# Altium PCB PX4FLOW2.1_X0.PcbDoc (part 1 of 2)
Units mm, origin at the board's own origin, x right, y up, seen from the top; angles counter-clockwise.
Board outline 26.52 x 51.99 mm, 6 copper layers (Top, Signal Layer 1, Signal Layer 2, Route2, Route15, Bottom), stack 1.474 mm thick; 94 components, 98 nets, 424 pads, 377 vias.
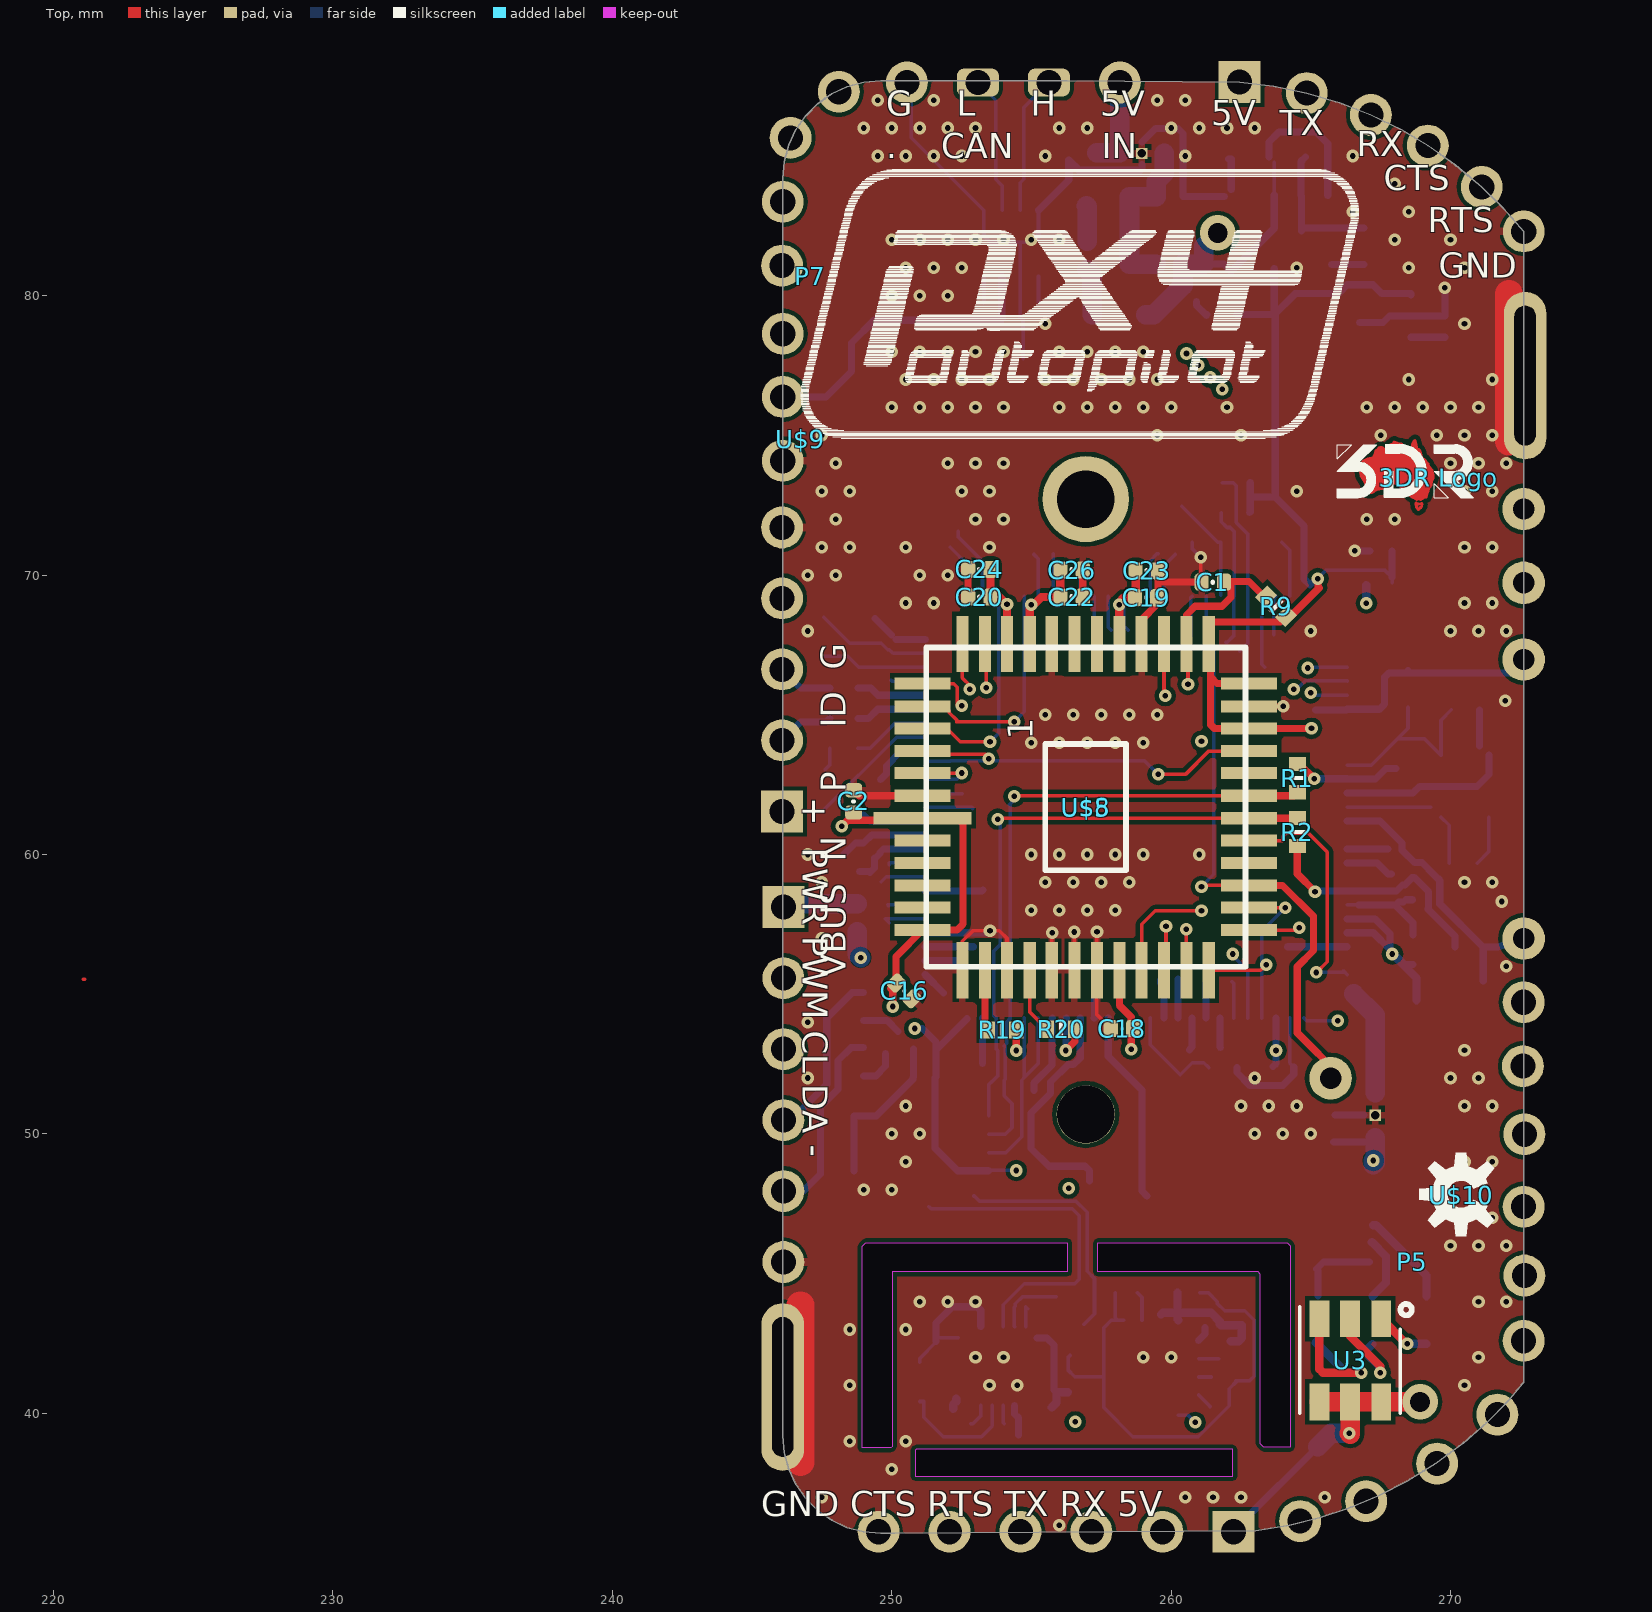
[diagram p0: Top view]
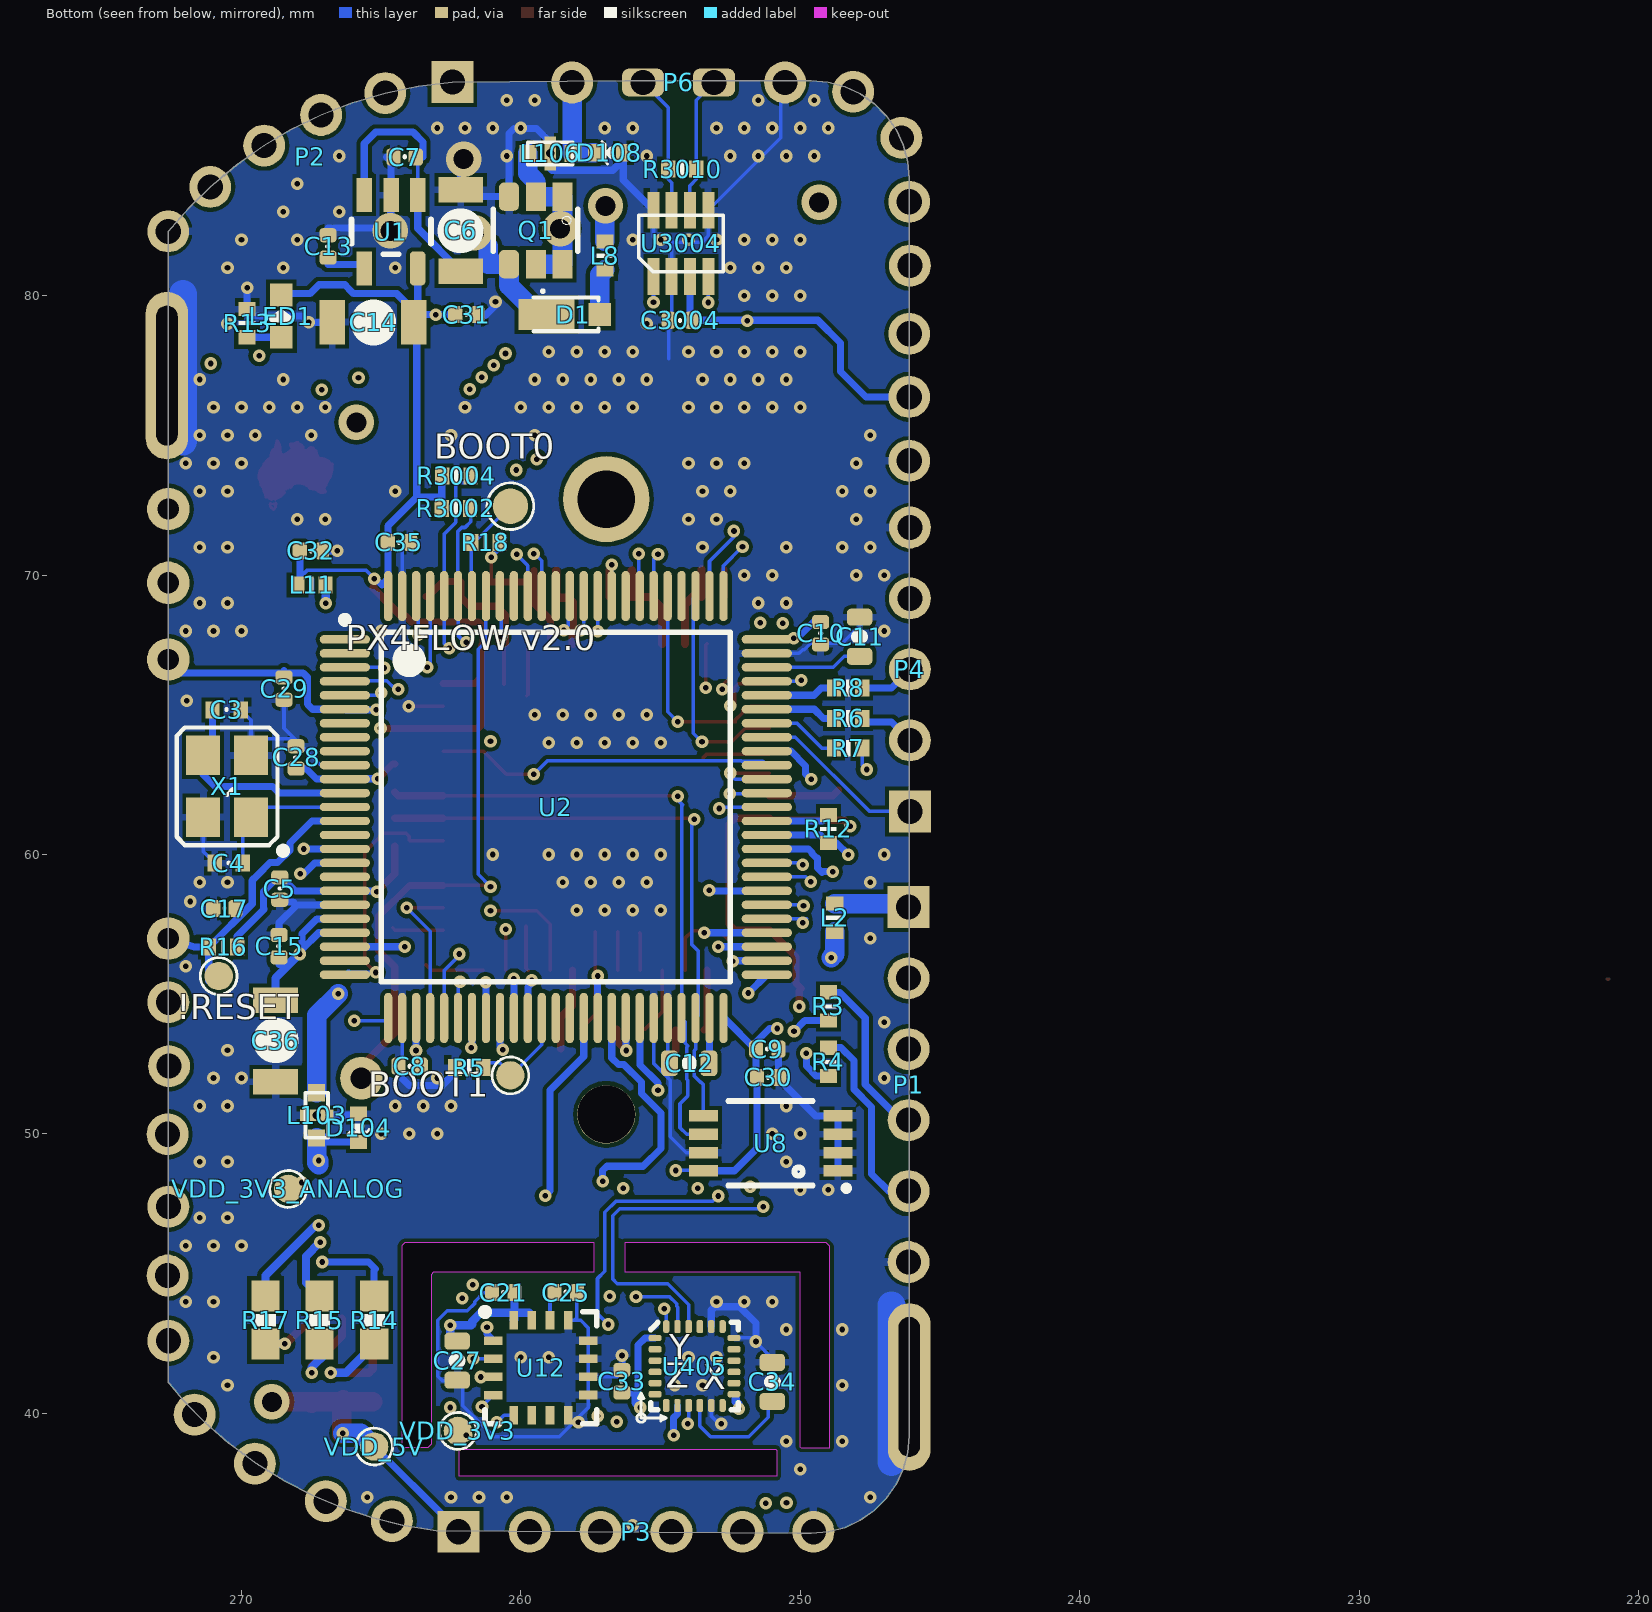
[diagram p1: Bottom view, seen from below]
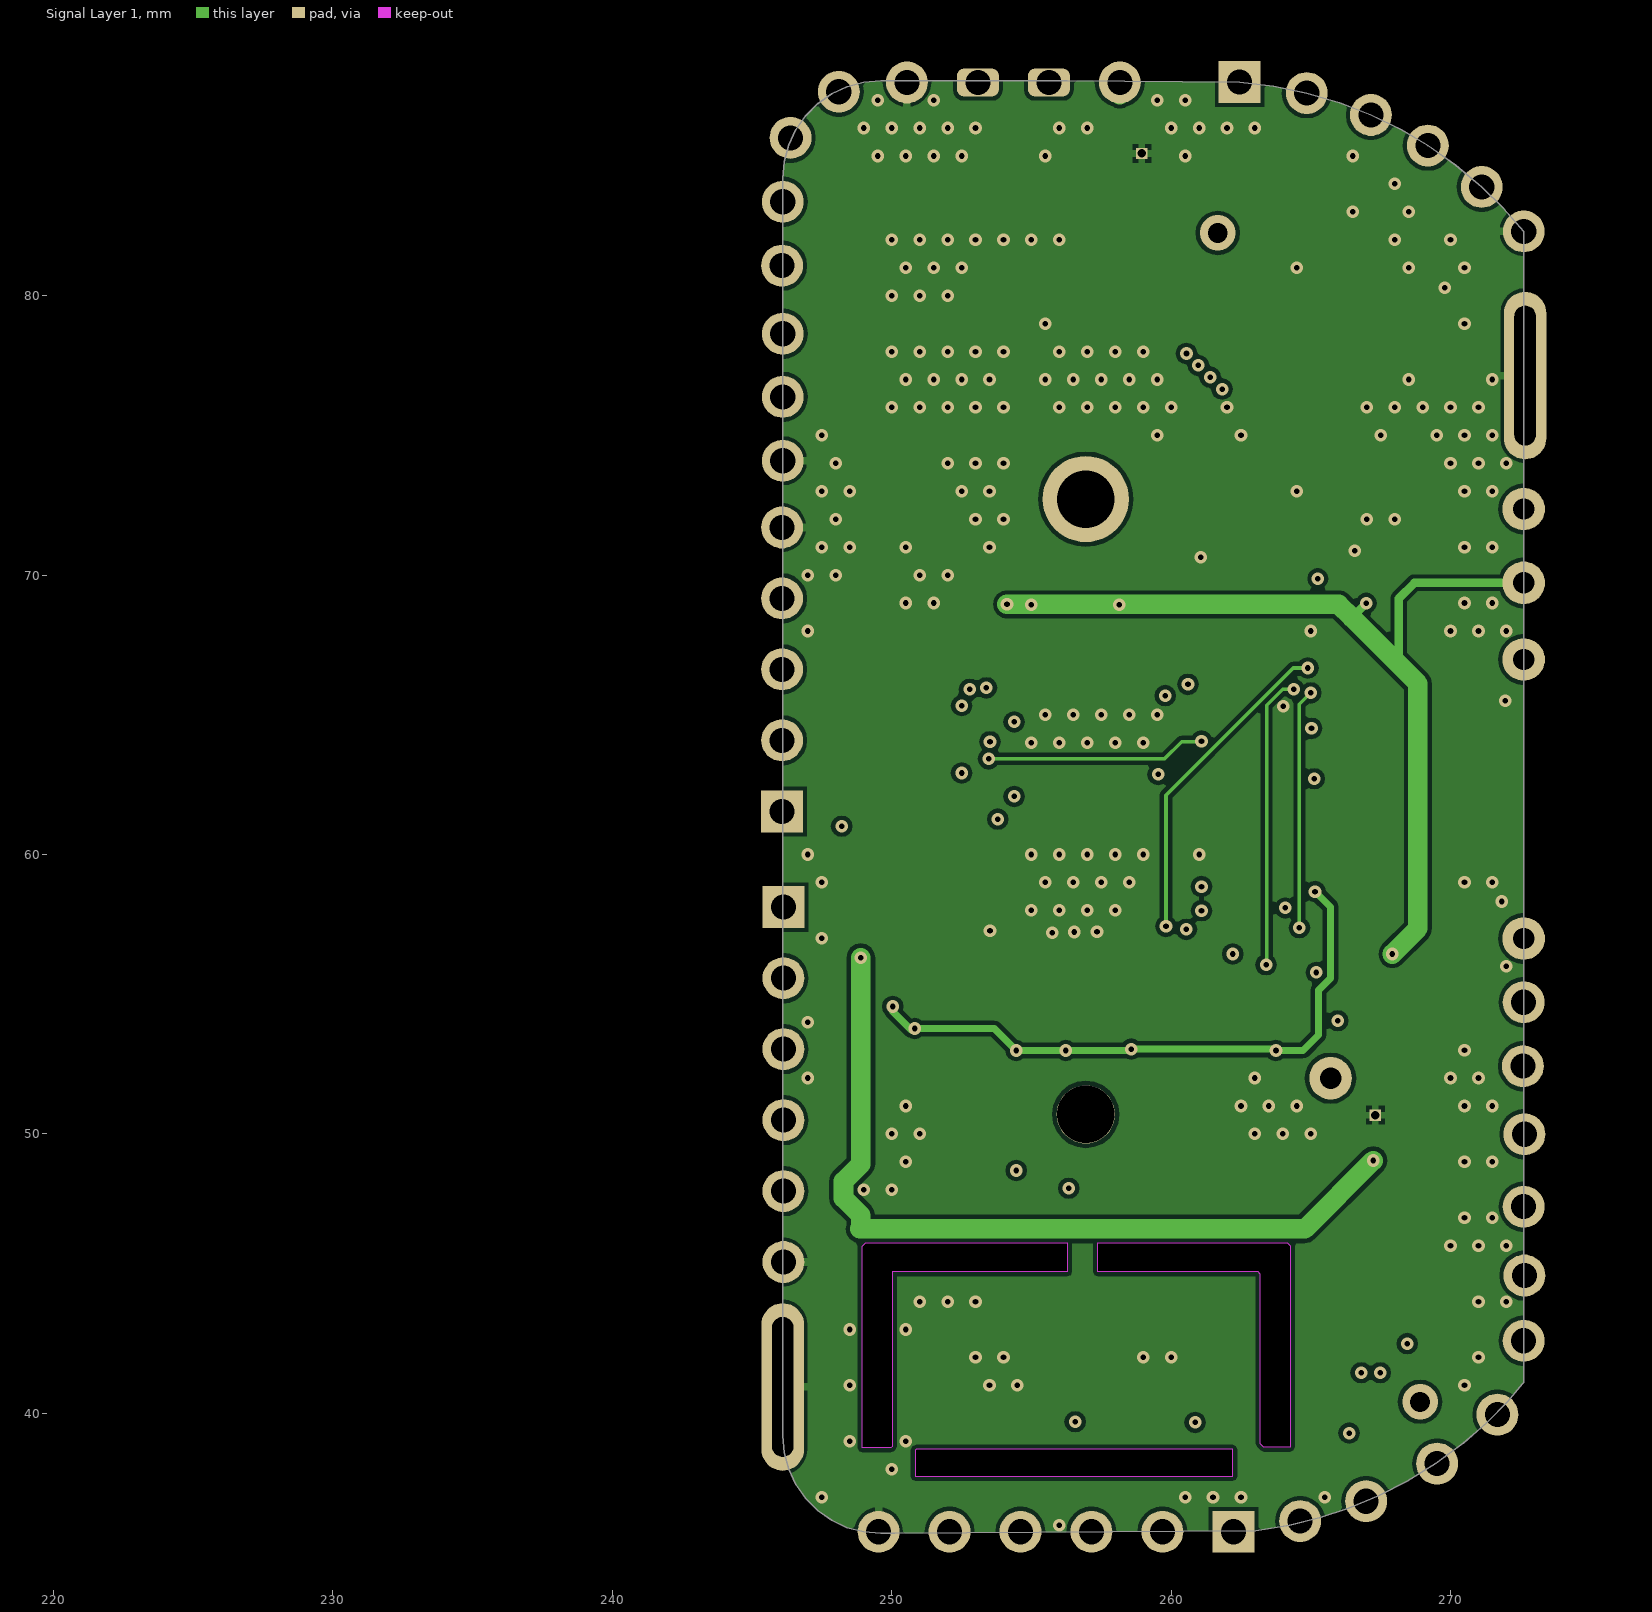
[diagram p2: Signal Layer 1]
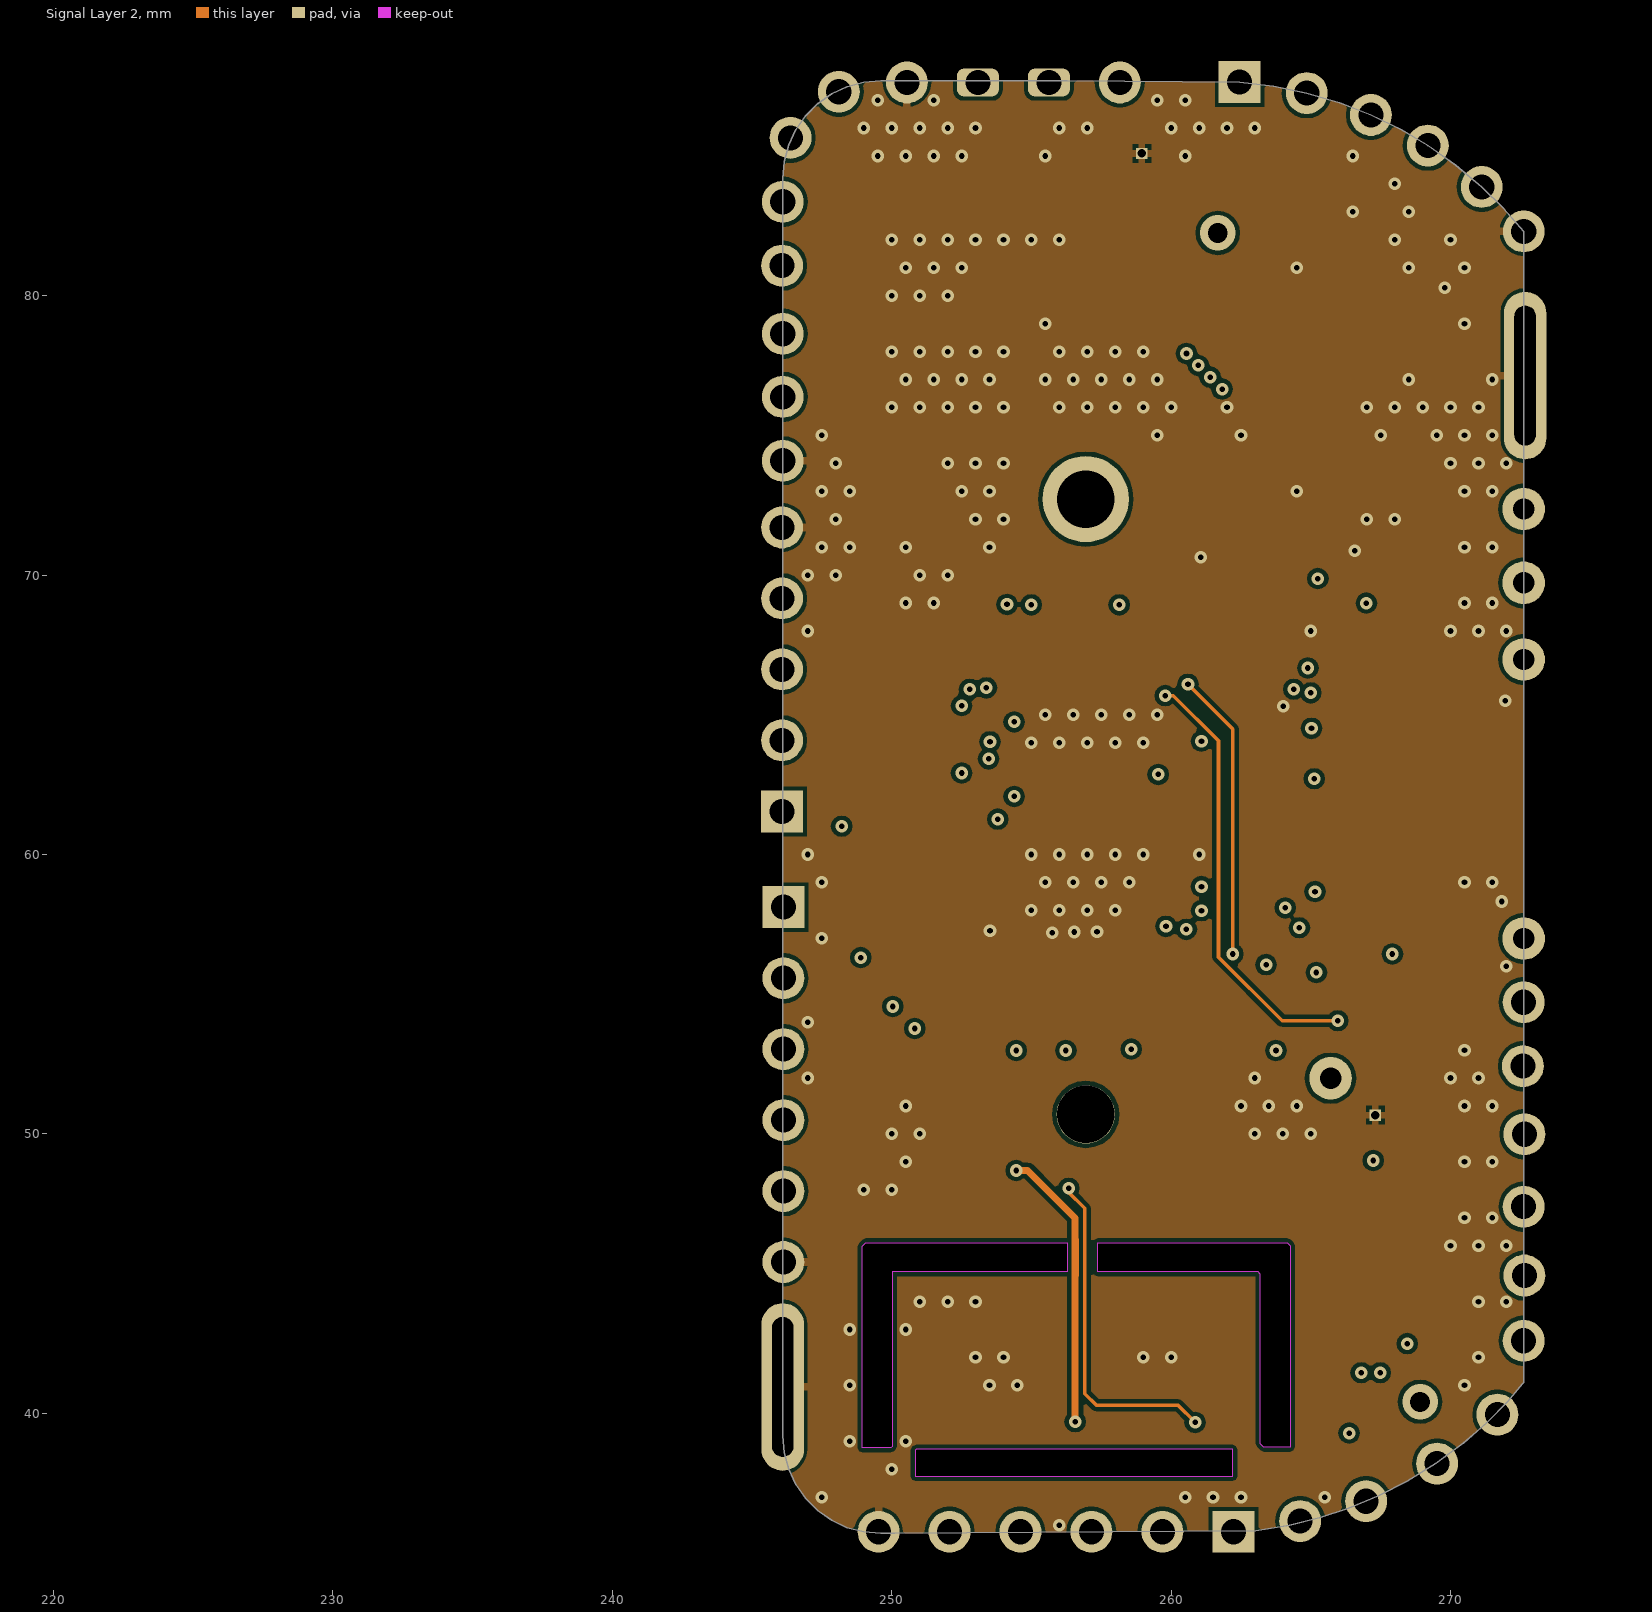
[diagram p3: Signal Layer 2]
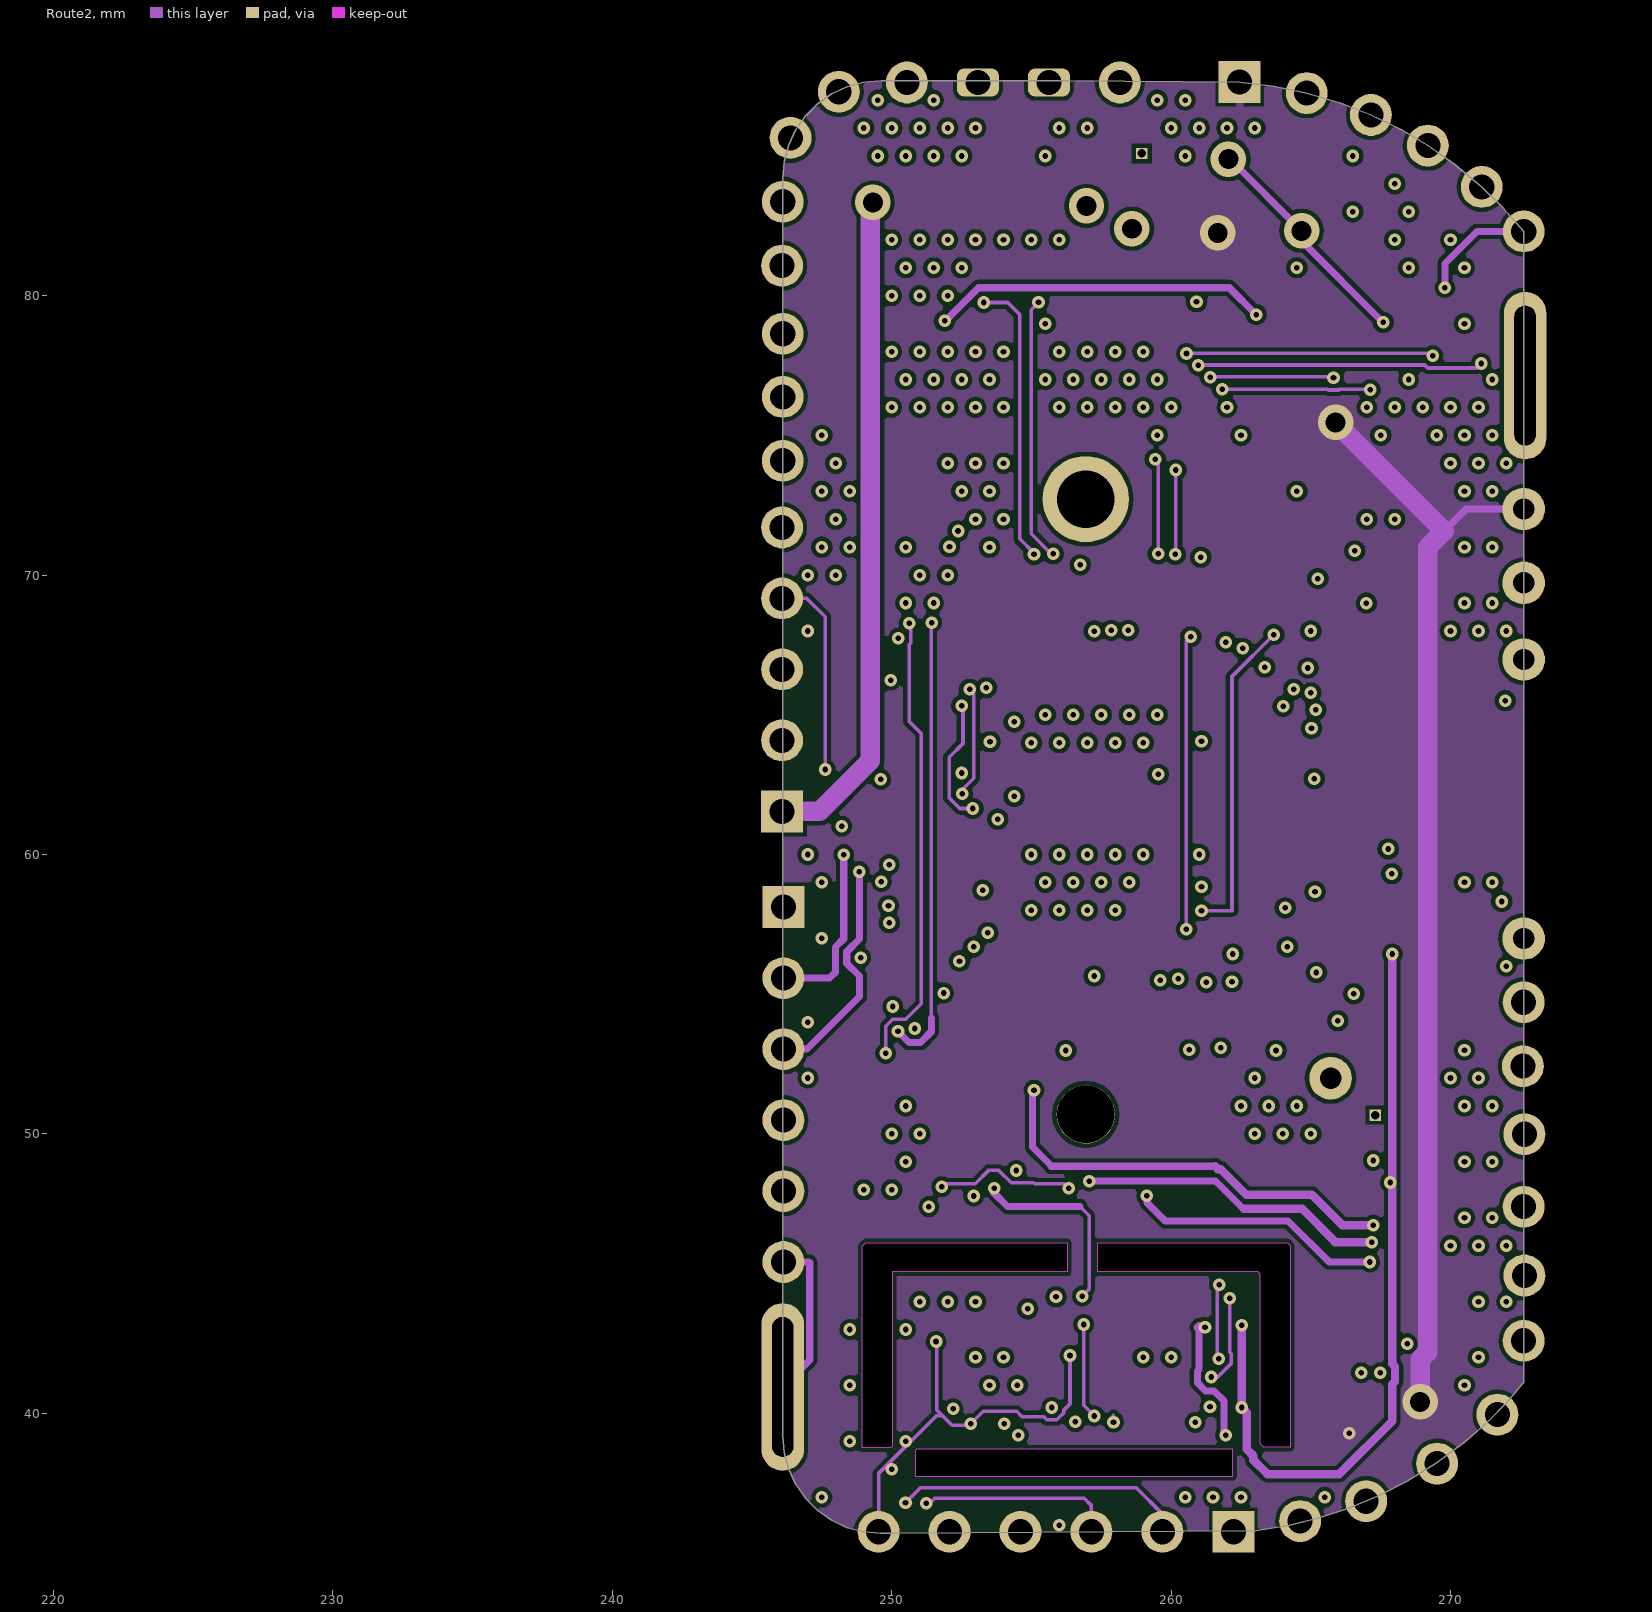
[diagram p4: Route2]
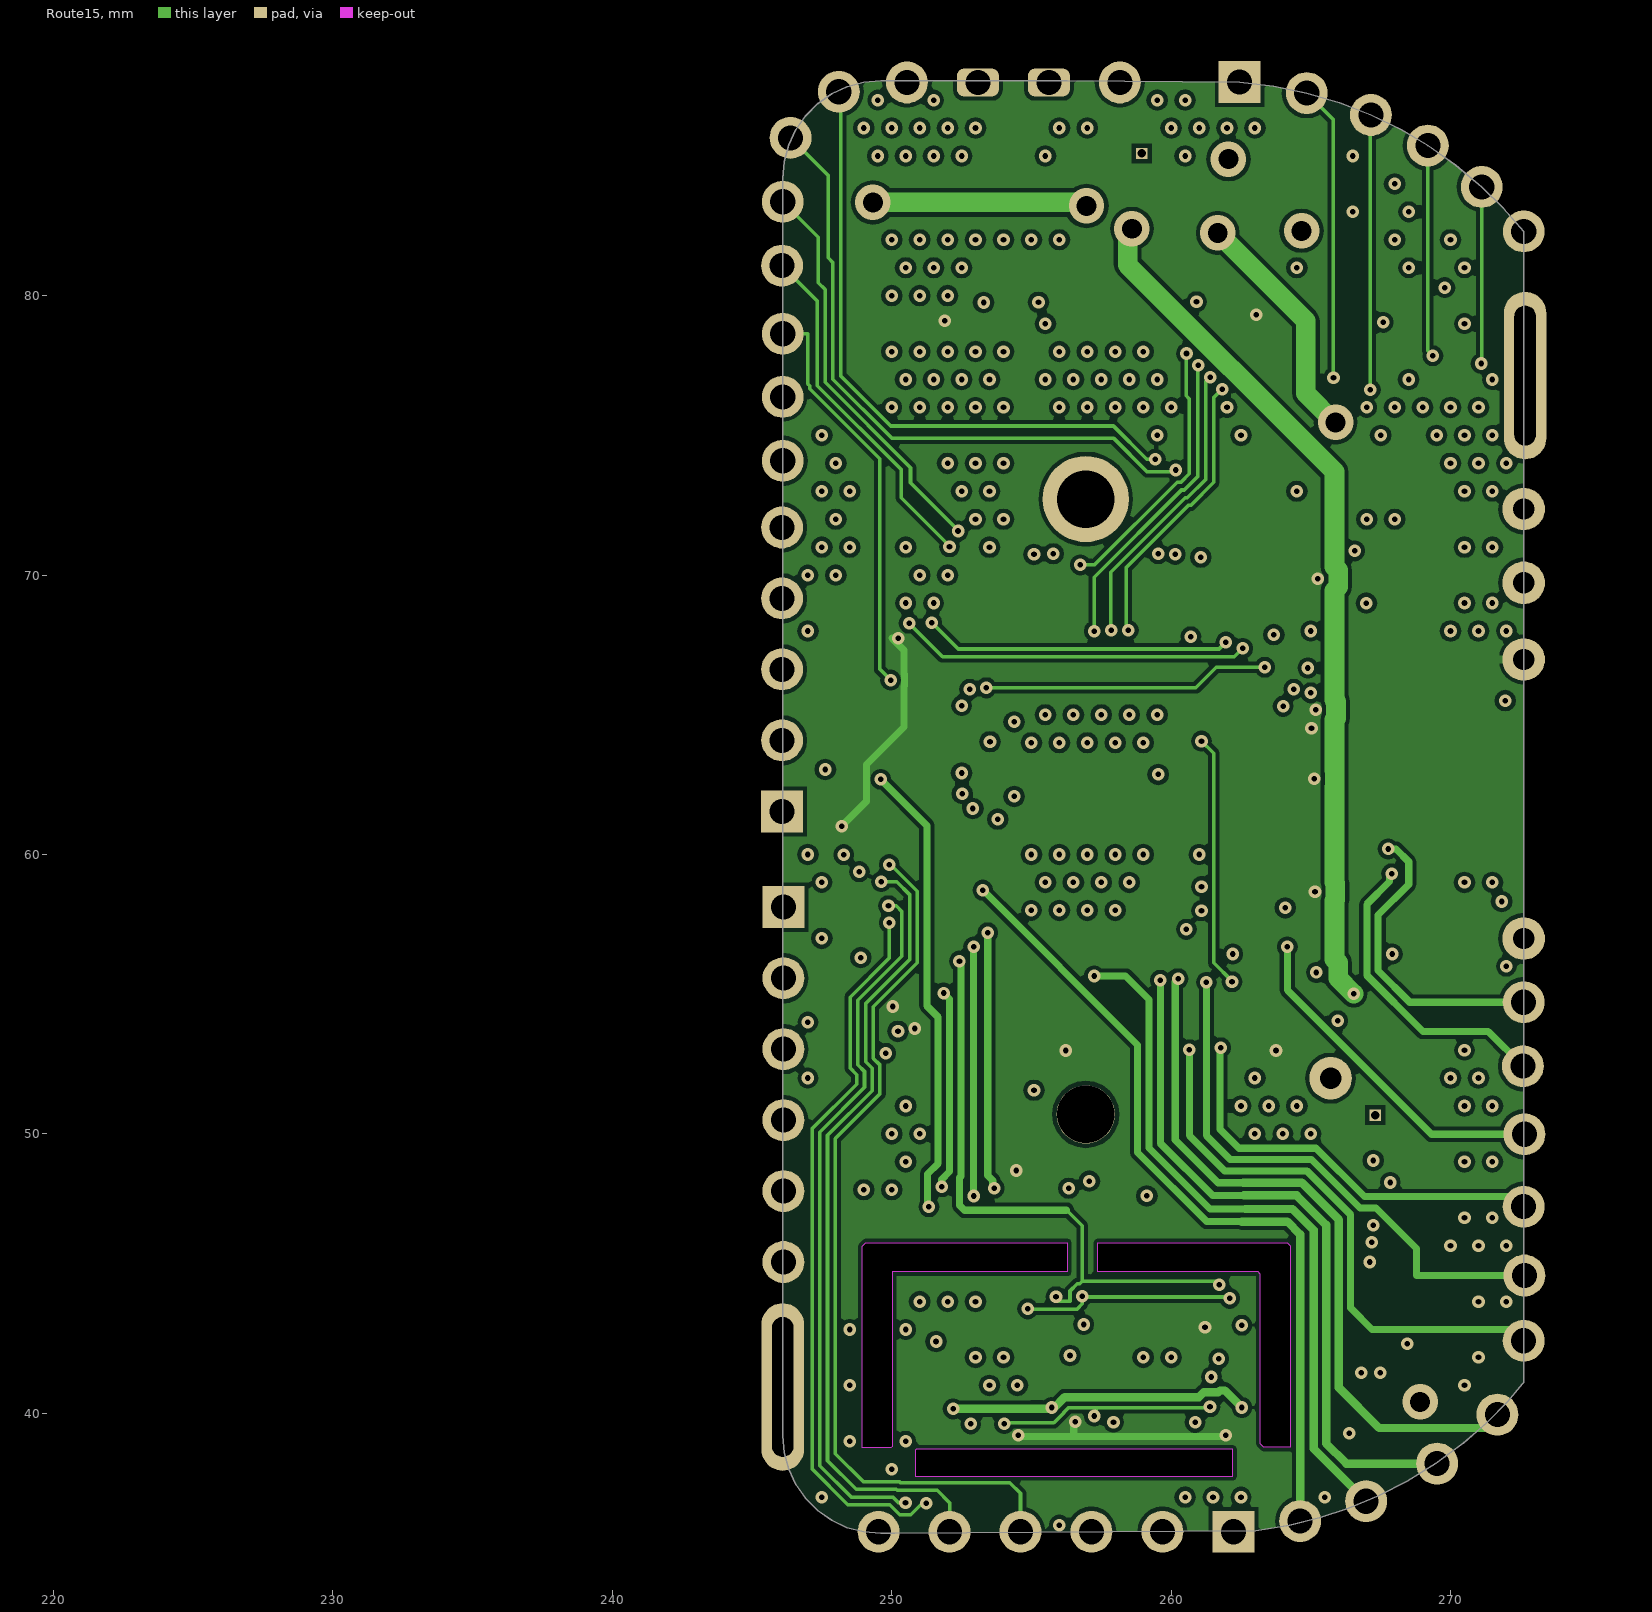
[diagram p5: Route15]
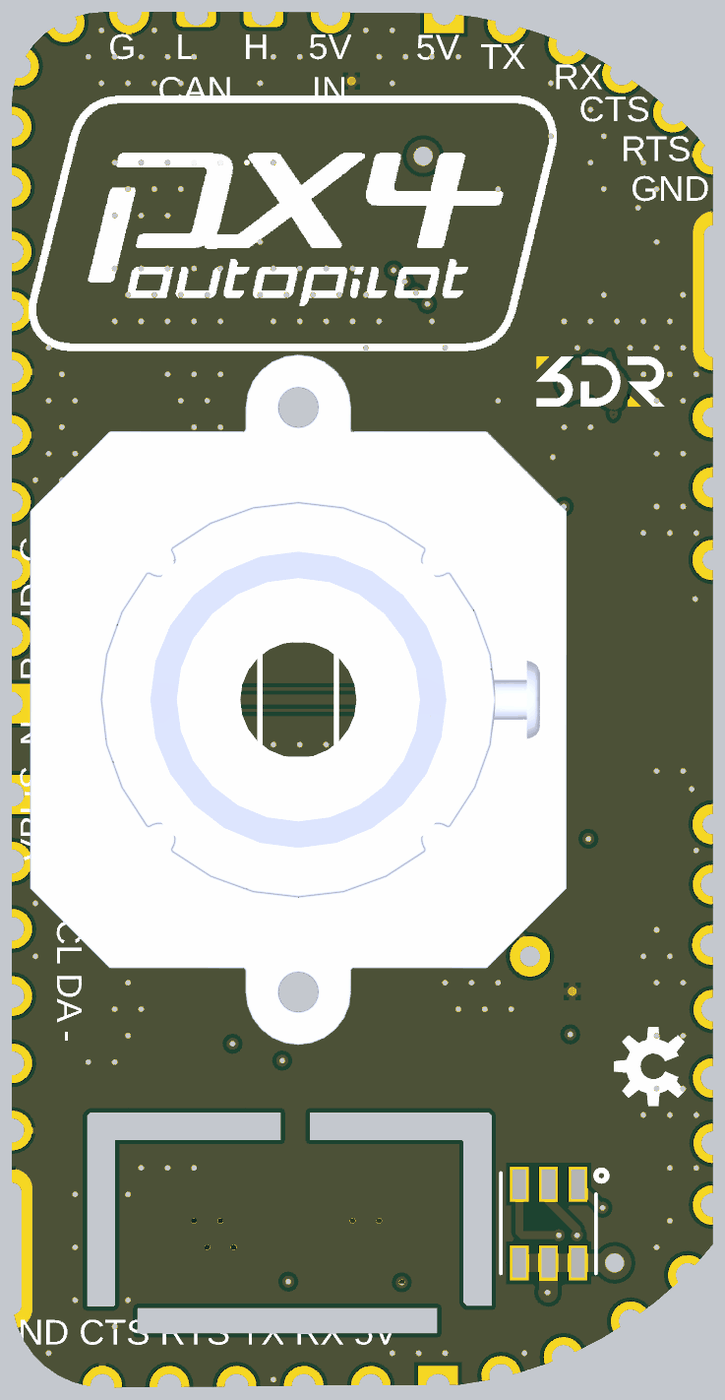
[diagram p7: 3D render of the assembled board from above, using the file's embedded part models]
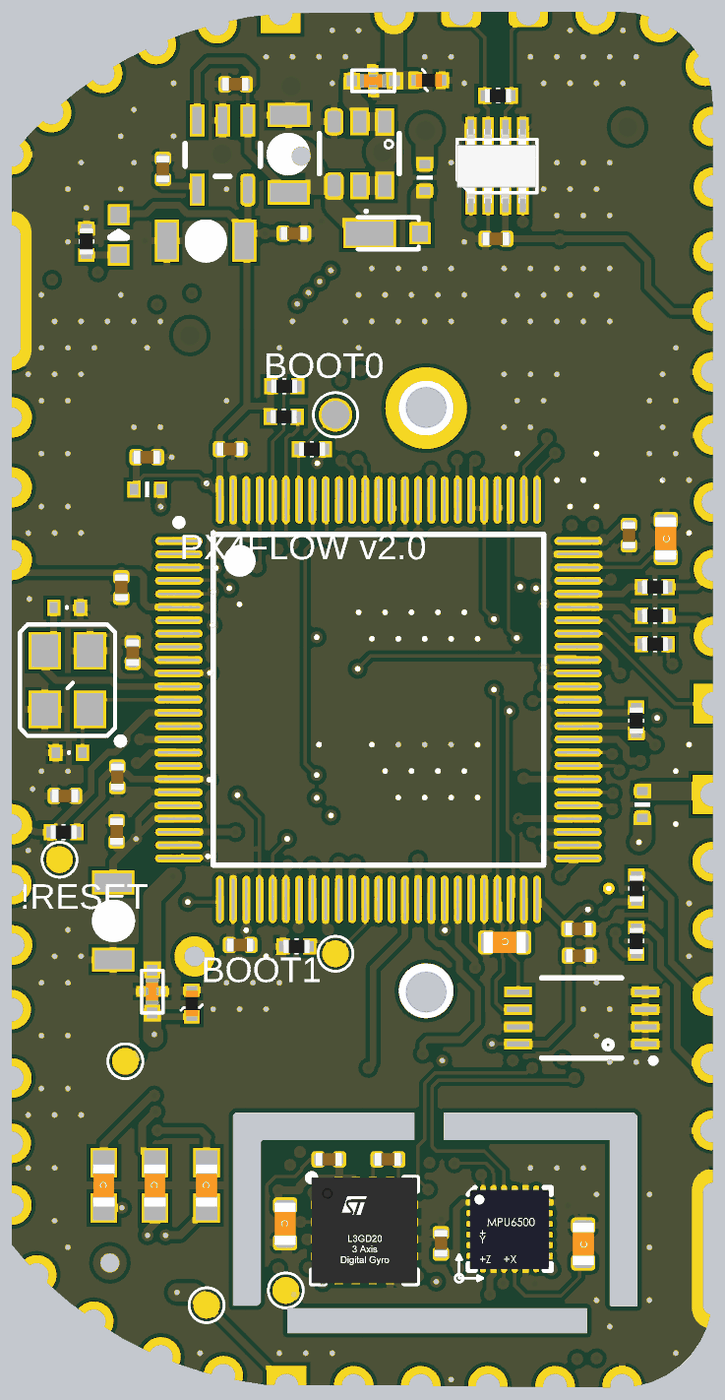
[diagram p8: 3D render of the assembled board from below, using the file's embedded part models]

## Layer stack, top to bottom
Top Solder: solder mask 0.0102, Solder Resist, Dk 3.5
Top: signal copper 0.035
Dielectric 1: core 0.5, FR-4, Dk 4.8
Signal Layer 1: signal copper 0.036
Dielectric 5: prepreg 0.127, Dk 4.2
Signal Layer 2: signal copper 0.036
Dielectric 4: core 0.254, Dk 4.2
Route2: signal copper 0.035
Dielectric 2: prepreg 0.127, FR-4, Dk 4.2
Route15: signal copper 0.035
Dielectric 3: core 0.254, FR-4, Dk 4.2
Bottom: signal copper 0.035
Bottom Solder: solder mask 0.0102, Solder Resist, Dk 3.5

## Board outline
247.355,36.519 247.854,36.169 248.407,35.912 248.997,35.754 249.604,35.7 250.104,35.7 263.031,35.804 264.235,35.999 265.306,36.262 266.346,36.601 267.465,37.068 268.44,37.569 269.472,38.207 270.454,38.933 271.283,39.655 272.054,40.434 272.569,41.046 272.622,41.099 272.622,82.299 271.898,83.126 271.118,83.891 270.187,84.67 269.188,85.373 268.241,85.934 267.152,86.467 266.02,86.907 264.855,87.252 263.663,87.499 262.454,87.646 256.28,87.693 250.104,87.693 249.604,87.693 248.997,87.64 248.407,87.482 247.854,87.224 247.355,86.874 246.923,86.442 246.573,85.943 246.316,85.39 246.158,84.8 246.104,84.193 246.104,39.2 246.158,38.593 246.316,38.003 246.573,37.45 246.923,36.951
cut-out: 262.204,38.71 250.876,38.71 250.85,38.684 250.85,37.744 262.204,37.744
cut-out: 257.378,46.101 264.16,46.101 264.262,45.999 264.262,38.786 263.322,38.786 263.195,38.913 263.195,44.983 263.119,45.06 257.378,45.06
cut-out: 256.286,45.06 250.012,45.06 250.012,38.811 249.961,38.76 248.945,38.76 248.945,45.974 249.072,46.101 256.286,46.101

## Design rules (kind name [scope] priority, off if disabled: settings)
Clearance [All] p1: gap=0.15
ComponentClearance [All] p1 off: gap=0.254 collisioncheckmode=3 verticalgap=0.254 showdistances=FALSE
DiffPairsRouting [All] p1: maxlimit=0.254 minlimit=0.254 mostfreqgap=0.254 toplayer_minwidth=0.254 toplayer_maxwidth=0.381 toplayer_prefwidth=0.254 midlayer1_minwidth=0.254 midlayer1_maxwidth=0.381 midlayer1_prefwidth=0.254 midlayer2_minwidth=0.254 midlayer2_maxwidth=0.381 midlayer2_prefwidth=0.254 midlayer3_minwidth=0.254 midlayer3_maxwidth=0.381 midlayer3_prefwidth=0.254 midlayer14_minwidth=0.254 midlayer14_maxwidth=0.381 midlayer14_prefwidth=0.254 bottomlayer_minwidth=0.254 bottomlayer_maxwidth=0.381 bottomlayer_prefwidth=0.254 maxuncoupledlength=12.7
HoleSize [All] p1: absolutevalues=TRUE maxlimit=9 minlimit=0.2 maxpercent=80.000 minpercent=20.000
HoleToHoleClearance mdViaViaSameLayer [All] p1: gap=0.203 allowstackedmicrovias=TRUE
HoleToHoleClearance [All] p2: gap=0.254 allowstackedmicrovias=TRUE
MinimumSolderMaskSliver [All] p1 off: minsoldermaskwidth=0.254
PasteMaskExpansion mlMinCreamFrame [All] p1: expansion=-0.102
PasteMaskExpansion [All] p2: expansion=0
PolygonConnect "ground edge" [InNamedPolygon('GND_L06_P040') vs (InPadClass('All Pads'))] p1: connectstyle=Direct reliefconductorwidth=0.254 reliefentries=4 polygonreliefangle="90 Angle" airgapwidth=0.127
PolygonConnect edge [All vs InNet('GND')] p2 off: connectstyle=Direct reliefconductorwidth=0.254 reliefentries=4 polygonreliefangle="90 Angle" airgapwidth=0.254
PolygonConnect ThermalVias [IsVia] p3: connectstyle=Direct reliefconductorwidth=0.254 reliefentries=4 polygonreliefangle="90 Angle" airgapwidth=0.254
PolygonConnect [All] p4: connectstyle=Relief reliefconductorwidth=0.254 reliefentries=4 polygonreliefangle="90 Angle" airgapwidth=0.127
RoutingVias [All] p1: holewidth=0.2 width=0.45 viastyle="Through Hole" minholewidth=0.2 minwidth=0.45 maxholewidth=0.711 maxwidth=1.27
SilkToBoardRegionClearance [All] p1 off:
SilkToSilkClearance [All] p1 off: silktosilkclearance=0.254
SilkToSolderMaskClearance [IsPad] p1 off: minsilkscreentomaskgap=0.254 clearancetoexposedcopper=TRUE
SolderMaskExpansion mlMinStopFrame [All] p1: expansion=0.025
SolderMaskExpansion [All] p2: expansion=0.102
Width Width_logo [(InComponent('3DR Logo'))] p1: maxlimit=1 minlimit=0.01 preferedwidth=0.254
Width Width_3V3_Analogue [InNet('VDD_3V3_ANALOG')] p2: maxlimit=0.7 minlimit=0.254 preferedwidth=0.3
Width [All] p3: maxlimit=1 minlimit=0.127 preferedwidth=0.254
21 further rules are at their usual default settings.

## Classes and differential pairs
component class PX4FLOW2.1_Sensors_CAN_X0: C21 C25 C27 C33 C34 C3004 R3010 U12 U405 U3004
component class PX4FLOW2.1_CAM_X0: C1 C2 C16 C18 C19 C20 C22 R9 R19 R20 U$5 U$8
component class PX4FLOW2.1_Power_X0: C5 C6 C7 C8 C9 C10 C13 C14 C15 C23 C24 C26 C28 C29 C31 C32 C35 C36 L11 LED1 Q1 R13 R14 R15 R17 U1 U3
component class PX4FLOW2.1_Connectors_X0: D1 D104 D108 L2 L8 L103 L106 P1 P2 P3 P4 P5 P6 P7 R6 R7 R8
component class PX4FLOW2.1_CPU_X0: "3DR Logo" !RESET BOOT0 BOOT1 C3 C4 C11 C12 C17 C30 R1 R2 R3 R4 R5 R12 R16 R18 R3002 R3004 U2 U8 U$9 U$10 VDD_3V3 VDD_3V3_ANALOG VDD_5V X1
differential pair OTG: +OTG_P -OTG_N
differential pair OTG_FS: +OTG_FS_P -OTG_FS_N

## Components (designator, comment, footprint, x,y, rotation, side; value= is the part's Value field where it differs from the comment)
"3DR Logo" "DO NOT PLACE" 3DR_AU 269.57,73.482 r0 top
!RESET "PAD.04" PAD.04X.04#1 270.815,55.651 r90 bottom
BOOT0 "PAD.05" PAD.05X.05 260.375,72.466 r90 bottom
BOOT1 "PAD.04" PAD.04X.04#2 260.375,52.095 r90 bottom
C1 "0u1" C0402 261.493,69.748 r180 top
C2 "0u1" C0402 248.641,61.9 r90 top
C3 "8p" 0402-CAP#1 270.535,65.178 r180 bottom
C4 "8p" 0402-CAP#1 270.459,59.692 r180 bottom
C5 "0u1" C0402 268.63,58.782 r270 bottom
C6 "100u" 1206-CAP 262.153,82.321 r90 bottom
C7 "0u1" C0402 264.16,84.963 r180 bottom
C8 "0u1" C0402 263.982,52.426 r0 bottom
C9 "0u1" C0402 251.181,53.035 r180 bottom
C10 "0u1" C0402 249.276,67.92 r270 bottom
C11 "2u2" 0603-CAP 247.879,67.793 r90 bottom
C12 "2u2" 0603-CAP 253.975,52.527 r0 bottom
C13 "470p" C0402 266.903,81.763 r89.99 bottom
C14 "100u" 1206-CAP 265.278,79.045 r0 bottom
C15 "0u1" C0402 268.656,56.718 r90 bottom
C16 "0u1" C0402 250.444,55.118 r315.02 top
C17 "0u1" C0402 270.612,58.064 r179.99 bottom
C18 "0u1" C0402 258.242,53.772 r180.02 top
C19 "0u1" C0402 259.105,69.19 r0 top
C20 "0u1" C0402 253.136,69.215 r180 top
C21 "0u1" C0402 260.629,44.323 r0 bottom
C22 "0u1" C0402 256.438,69.215 r0 top
C23 "0u1" C0402 259.131,70.155 r0.01 top
C24 "0u01" C0402 253.136,70.206 r180 top
C25 "0u01" C0402 258.394,44.323 r180 bottom
C26 "0u001" C0402 256.438,70.18 r0.01 top
C27 "2u2" 0603-CAP 262.28,41.885 r270 bottom
C28 "0u1" C0402 268.046,63.475 r89.98 bottom
C29 "0u1" C0402 268.478,65.938 r269.99 bottom
C30 "0u1" C0402 251.155,52.019 r180 bottom
C31 "0u1" C0402 261.95,79.324 r180 bottom
C32 "0u1" C0402 267.513,70.866 r180 bottom
C33 "0u1" 0402-CAP#2 256.388,41.148 r90 bottom
C34 "2u2" 0603-CAP 251.003,41.123 r90 bottom
C35 "0u1" C0402 264.363,71.171 r180 bottom
C36 "100u" 1206-CAP 268.783,53.34 r270 bottom
C3004 "0u1" 0402-CAP#2 254.305,79.121 r0 bottom
D1 "MSS1P4-M3" MICROSMP 257.835,79.324 r180 bottom
D104 "DIODE-TVS" 0402-TVS 265.811,50.216 r90 bottom
D108 "DIODE-TVS" 0402-TVS 256.845,85.115 r180 bottom
L2 "Inductor" L0402 248.768,57.734 r90 bottom
L8 "FERRITE BEAD 120 OHM 0402" L0402 256.997,81.432 r89.99 bottom
L11 "Inductor" L0402 267.498,69.647 r179.99 bottom
L103 "Kyocera KNH16C104DA5TS EMI filter" KYOCERA-KNH16-DA 267.31,50.673 r270 bottom
L106 "Kyocera KNH16C104DA5TS EMI filter" KYOCERA-KNH16-DA 258.953,85.09 r180 bottom
LED1 "GREEN" LED-0603 268.58,79.273 r0 bottom
P1 "Header 6" HDR1X6#1 246.126,58.115 r270 bottom
P2 "Header 6" HDR1X6#2 272.136,88.951 r0 bottom
P3 "Header 6" HDR1X6#1 262.23,35.763 r180 bottom
P4 "Header 5" HDR1X5 246.075,61.544 r90 bottom
P5 "Header 10" HDR1X10 275.285,38.633 r90 top
P6 "Header 4" HDR1X4 258.166,87.63 r180 bottom
P7 "Header 7" HDR1X7 241.554,72.288 r90 top
Q1 "NTGS4111P" TSOP-6 259.461,82.347 r359.99 bottom
R1 "1k5" R0402 264.516,62.738 r270.01 top
R2 "1k5" R0402 264.516,60.808 r270.01 top
R3 "100" R0402 248.996,54.559 r90 bottom
R4 "100" R0402 248.996,52.578 r90 bottom
R5 "10K" R0402 261.849,52.375 r0 bottom
R6 "22R" R0402 248.285,64.872 r0 bottom
R7 "10k" R0402 248.285,63.805 r0 bottom
R8 "22R" R0402 248.285,65.964 r0 bottom
R9 "10k" R0402 263.754,68.885 r315 top
R12 "470" R0402 248.996,60.909 r90 bottom
R13 "270R" R0402 269.799,79.019 r269.99 bottom
R14 "68R" 0603-RES 265.252,43.332 r90 bottom
R15 "5R6" 0603-RES 267.208,43.332 r90 bottom
R16 "10K" R0402 270.662,56.693 r180 bottom
R17 "5R6" 0603-RES 269.138,43.332 r90 bottom
R18 "10K" R0402 261.264,71.171 r0 bottom
R19 "1k" R0402 253.949,53.721 r0 top
R20 "1k" R0402 256.057,53.746 r0 top
R3002 "1K5" R0402 262.331,72.39 r180 bottom
R3004 "1K5" R0402 262.314,73.548 r180 bottom
R3010 "120R" R0402 254.229,84.531 r180 bottom
U1 "V_REG_LDOSMD" SOT23-5 264.643,82.296 r0 bottom
U2 "STM32F427VIT7TR" STM-LQFP100_N 258.75,61.698 r180 bottom
U3 "LRTB GFTG-T7AW-1+V7A7-29+R5T9-49-L" 6-PLCC 266.404,41.91 r270 top
U8 "128KB EEPROM" MSOP-8 251.054,49.657 r90 bottom
U12 "L3GD20" L3GD20 259.283,41.631 r180 bottom
U405 "MPU-9250" MPU-6500 253.797,41.681 r180 bottom
U3004 "3.3-V CAN TRANSCEIVER" SOT23-8 254.279,81.864 r180 bottom
U$5 "MT9V034" CLCC-48 256.946,61.697 r90 top
U$8 "LENSMOUNT_M12" LENSMOUNT_LARGE_M12 256.946,61.697 r90 top
U$9 "PX4-LOGO-20MM" PX4-LOGO-20MM 246.736,74.879 r180 top
U$10 "OSHW-LOGOS" OSHW-LOGO-S 270.383,47.828 r90 top
VDD_3V3 "PAD.04" PAD.04X.04#2 262.255,39.37 r90 bottom
VDD_3V3_ANALOG "PAD.04" PAD.04X.04#2 268.326,48.031 r90 bottom
VDD_5V "PAD.04" PAD.04X.04#2 265.252,38.811 r90 bottom
X1 "Crystal Oscillator in 3.2x2.5 SMD" OSCILLATOR-3.2X2.5 270.51,62.435 r90 bottom

## Footprints (in the part's own frame and the unit in brackets; to place one, negate y for a bottom-side part, rotate by r counter-clockwise, add the part's x,y. Pads: shape width x height; smd on the part's side, far side on the other; paste and mask are expansions set on the pad)
3DR_AU [mm]
  Top region: -2.175,1 -2.25,0.925 -2.25,0.825 -2.4,0.675 -2.625,0.675 -2.8,0.5 -2.8,0.175 -2.7,0.075 -2.7,-0.1 -2.525,-0.275 -2.525,-0.425 -2.575,-0.475 -2.525,-0.525 -2.4,-0.525 -2.325,-0.45 -2.225,-0.45 -2.15,-0.375 -2.025,-0.375 -1.85,-0.2 -1.475,-0.2 -1.35,-0.325 -1.325,-0.3 -1.225,-0.3 -1.1,-0.425 -1.1,-0.55 -1.075,-0.55 -0.925,-0.7 -0.85,-0.7 -0.8,-0.75 -0.525,-0.75 -0.4,-0.625 -0.4,-0.425 -0.25,-0.275 -0.25,-0.1 -0.175,-0.025 -0.175,0.175 -0.275,0.275 -0.275,0.35 -0.375,0.45 -0.375,0.5 -0.4,0.5 -0.5,0.6 -0.5,0.625 -0.65,0.775 -0.65,0.95 -0.725,1.025 -0.775,1.025 -0.775,1.15 -0.85,1.225 -0.85,1.3 -0.875,1.3 -0.925,1.25 -0.925,1 -1,0.925 -1,0.825 -1.025,0.8 -1.075,0.85 -1.2,0.85 -1.325,0.975 -1.325,0.975 -1.375,1.025 -1.35,1.05 -1.35,1.175 -1.4,1.225 -1.575,1.225 -1.625,1.175 -1.725,1.175 -1.725,1.15 -1.775,1.1 -1.775,1 -1.8,1 -1.825,0.975 -1.85,1 -1.95,1 -2.025,1.075 -2.125,1.075
  Top lines w0.1: -2.825,0.494 -2.818,0.428 -2.815,0.368 -2.812,0.311 -2.807,0.256 -2.8,0.213 -2.789,0.169 -2.773,0.122 -2.751,0.073 -2.773,0.066 -2.618,-0.181 -2.615,-0.209 -2.606,-0.236 -2.594,-0.261 -2.579,-0.286 -2.553,-0.324 -2.527,-0.362 -2.54,-0.414 -2.553,-0.437 -2.564,-0.456 -2.571,-0.471 -2.575,-0.481 -2.576,-0.489 -2.576,-0.496 -2.573,-0.501 -2.567,-0.507 -2.558,-0.512 -2.536,-0.518 -2.509,-0.524 -2.475,-0.531 -2.439,-0.534 -2.407,-0.531 -2.379,-0.522 -2.352,-0.508 -2.326,-0.492 -2.292,-0.469 -2.256,-0.446 -2.216,-0.427 cw(c-1.816,-1.986) -2.008,-0.388 -1.982,-0.323 cw(c-1.007,-2.013) -1.775,-0.22 -1.739,-0.209 -1.697,-0.201 -1.65,-0.195 -1.602,-0.193 -1.553,-0.195 -1.513,-0.201 -1.476,-0.21 -1.442,-0.223 -1.412,-0.241 -1.388,-0.263 -1.37,-0.291 -1.359,-0.316 -1.35,-0.333 -1.344,-0.343 -1.342,-0.345 -1.34,-0.346 -1.338,-0.346 -1.336,-0.346 -1.333,-0.344 -1.331,-0.342 -1.323,-0.333 -1.311,-0.317 -1.294,-0.296 ccw(c-1.322,-0.176) -1.231,-0.258 -1.23,-0.264 -1.231,-0.27 -1.234,-0.284 -1.242,-0.313 -1.247,-0.331 -1.25,-0.348 -1.251,-0.362 -1.25,-0.368 -1.247,-0.372 -1.244,-0.374 -1.241,-0.375 -1.236,-0.375 -1.23,-0.365 -1.222,-0.351 -1.214,-0.337 -1.206,-0.325 -1.199,-0.316 -1.195,-0.313 -1.191,-0.311 -1.188,-0.31 -1.185,-0.31 -1.182,-0.312 -1.18,-0.314 -1.177,-0.32 -1.174,-0.329 -1.172,-0.342 -1.175,-0.356 -1.178,-0.369 -1.18,-0.378 -1.181,-0.386 -1.18,-0.39 -1.18,-0.392 -1.178,-0.395 -1.175,-0.396 -1.172,-0.397 -1.167,-0.398 -1.162,-0.397 -1.154,-0.395 -1.143,-0.392 -1.121,-0.415 -1.106,-0.435 -1.098,-0.455 -1.098,-0.472 -1.103,-0.493 -1.114,-0.518 -1.084,-0.563 -1.052,-0.602 -1.018,-0.634 -0.982,-0.662 -0.944,-0.686 -0.892,-0.716 -0.836,-0.745 -0.777,-0.777 -0.754,-0.764 -0.737,-0.754 -0.723,-0.748 -0.711,-0.746 -0.7,-0.747 -0.689,-0.752 -0.676,-0.76 -0.659,-0.77 -0.638,-0.784 cw(c-0.385,-1.046) -0.44,-0.686 cw(c1.383,-1.062) -0.336,-0.349 ccw(c-0.439,-0.2) -0.258,-0.206 -0.251,-0.165 -0.239,-0.125 -0.225,-0.086 -0.211,-0.047 -0.201,-0.016 -0.194,0.015 -0.192,0.047 -0.194,0.079 -0.201,0.117 -0.209,0.152 -0.217,0.187 -0.226,0.228 -0.233,0.273 -0.266,0.315 -0.299,0.355 -0.328,0.396 -0.348,0.43 -0.364,0.466 -0.375,0.506 -0.396,0.513 -0.412,0.522 -0.424,0.532 -0.433,0.544 -0.441,0.557 -0.45,0.577 -0.462,0.599 -0.479,0.623 -0.499,0.644 -0.523,0.662 -0.548,0.677 -0.579,0.695 -0.608,0.714 -0.615,0.748 -0.621,0.786 -0.627,0.826 -0.634,0.868 -0.644,0.908 -0.654,0.939 -0.668,0.967 -0.685,0.991 -0.701,1.005 -0.719,1.016 -0.74,1.023 -0.764,1.025 ccw(c-2.095,0.858) -0.842,1.336 -0.866,1.319 -0.887,1.296 -0.903,1.267 -0.917,1.235 -0.928,1.197 -0.937,1.157 -0.944,1.115 -0.95,1.071 -0.955,1.028 -0.96,0.988 -0.965,0.952 -0.971,0.921 cw(c-1.47,1.161) -1.036,0.818 -1.069,0.821 -1.103,0.831 -1.137,0.846 -1.172,0.865 -1.207,0.888 -1.241,0.913 -1.28,0.943 -1.318,0.973 -1.353,1.001 -1.386,1.025 -1.354,1.088 -1.363,1.093 -1.369,1.099 -1.372,1.104 -1.374,1.111 -1.374,1.118 -1.371,1.124 -1.367,1.13 -1.358,1.136 -1.347,1.14 -1.334,1.142 -1.326,1.167 -1.321,1.187 -1.32,1.201 -1.321,1.206 -1.323,1.209 -1.327,1.211 -1.331,1.213 -1.337,1.213 -1.344,1.213 -1.362,1.211 -1.386,1.206 ccw(c-1.915,0.11) -1.593,1.284 -1.594,1.278 -1.593,1.273 -1.591,1.27 -1.588,1.267 -1.58,1.263 -1.57,1.26 -1.56,1.256 -1.551,1.249 -1.546,1.242 -1.543,1.232 -1.542,1.219 -1.554,1.218 -1.572,1.216 -1.594,1.214 -1.618,1.211 -1.644,1.207 -1.668,1.201 -1.691,1.194 -1.712,1.186 -1.728,1.176 -1.737,1.168 -1.742,1.158 -1.743,1.147 -1.74,1.134 -1.756,1.127 -1.768,1.119 -1.776,1.11 -1.781,1.095 -1.78,1.078 -1.776,1.06 -1.769,1.041 -1.764,1.02 -1.762,0.999 -1.801,0.988 -1.834,0.982 -1.864,0.981 -1.891,0.986 -1.916,0.995 -1.947,1.014 -1.977,1.042 -2.008,1.077 -2.033,1.081 -2.059,1.083 -2.086,1.083 -2.11,1.078 -2.132,1.069 -2.149,1.053 -2.157,1.039 -2.162,1.021 -2.164,0.999 -2.177,0.989 -2.187,0.98 -2.193,0.973 -2.197,0.97 -2.201,0.968 -2.204,0.967 -2.206,0.968 -2.209,0.969 -2.217,0.975 -2.229,0.986 -2.244,0.955 -2.256,0.92 -2.267,0.884 -2.277,0.847 -2.289,0.811 -2.301,0.784 -2.316,0.759 -2.334,0.736 -2.356,0.717 -2.384,0.701 -2.412,0.692 -2.441,0.688 -2.471,0.686 -2.495,0.685 -2.518,0.681 -2.54,0.675 -2.568,0.661 -2.593,0.645 -2.617,0.63 -2.637,0.62 -2.658,0.613 -2.682,0.61 -2.706,0.578 -2.728,0.549 -2.75,0.524 -2.77,0.509 -2.795,0.499 -2.825,0.494 ; -0.804,-0.956 -0.804,-0.899 -0.785,-0.904 -0.703,-0.942 -0.599,-0.921 -0.594,-0.934 -0.599,-1.008 -0.642,-1.082 -0.664,-1.065 -0.712,-1.139 -0.73,-1.135 -0.786,-1.051 -0.795,-1.004 -0.787,-0.997 -0.804,-0.956
  silkscreen extent -3.62,-0.71 1.24,1.19
6-PLCC [mil]
  rect 52x28 smd: A1(59,44) A2(59,0) A3(59,-43.31) C1(-58.07,44) C2(-58.07,0) C3(-58.07,-43.31)
  silkscreen extent -79,-71 75,87
0402-CAP#1 [mil] "0402-CAP"
  rect 20x24 smd: P$1(-19.68,0) P$2(20,0)
  silkscreen extent 0,0 0,1
0402-CAP#2 [mil]
  rrect50% 20x24 smd mask+0: P$1(-15.75,0) P$2(15.75,0)
  silkscreen extent 0,0 0,1, body extent -20,-10 20,10, height 20
0402-TVS [mil] "0402-TVS"
  rect 20x24 smd: A(20,0) C(-19.68,0)
  silkscreen extent -10,-16 3,16, body extent -20,-10 20,10, height 20
0603-CAP [mil] "0603-CAP"
  rrect50% 24x36 smd mask+0: P$1(-27.56,0) P$2(27.56,0)
  silkscreen extent 0,-2 0,2, body extent -31,-16 31,16, height 34
0603-RES [mil] "0603-RES"
  rect 44x40 smd: 1(-33.46,0) 2(34,0)
  silkscreen extent -9,-15 9,15, body extent -31,-16 31,16, height 34
1206-CAP [mil]
  rect 36x63 smd: P$1(-57.09,0) P$2(58,0)
  silkscreen extent 0,0 0,1
C0402 [mil]
  rrect50% 20x24 smd mask+0: 1(-15.75,0) 2(15.75,0)
  silkscreen extent 0,0 0,1, body extent -20,-10 20,10, height 20
CLCC-48 [mil] "CLCC-48"
  rect 17x138 smd: 1(-15.75,230)
  rect 17x79 smd: 2(-47.24,230) 3(-78.74,230) 4(-110.24,230) 5(-141.73,230) 6(-173.23,230) 19(-173.23,-229.92) 20(-141.73,-229.92) 21(-110.24,-229.92) 22(-78.74,-229.92) 23(-47.24,-229.92) 24(-15.75,-229.92) 25(16,-229.92) 26(48,-229.92) 27(79,-229.92) 28(111,-229.92) 29(142,-229.92) 30(174,-229.92) 43(174,230) 44(142,230) 45(111,230) 46(79,230) 47(48,230) 48(16,230)
  rect 79x17 smd: 7(-229.92,174) 8(-229.92,142) 9(-229.92,111) 10(-229.92,79) 11(-229.92,48) 12(-229.92,16) 13(-229.92,-15.75) 14(-229.92,-47.24) 15(-229.92,-78.74) 16(-229.92,-110.24) 17(-229.92,-141.73) 18(-229.92,-173.23) 31(230,-173.23) 32(230,-141.73) 33(230,-110.24) 34(230,-78.74) 35(230,-47.24) 36(230,-15.75) 37(230,16) 38(230,48) 39(230,79) 40(230,111) 41(230,142) 42(230,174)
  silkscreen extent -225,-225 225,225
HDR1X4 [mm] "Connector; Header; 4 Position"
  round 1.5 hole 0.9: 1(0,0) 4(7.62,0)
  rrect50% 1.5x1 hole 0.9: 2(2.54,0) 3(5.08,0)
HDR1X5 [mm] "Connector; Header; 5 Position"
  rect 1.5x1.5 hole 0.9: 1(0,0)
  round 1.5 hole 0.9: 2(2.54,0) 3(5.08,0) 4(7.62,0) 5(10.16,0)
HDR1X6#1 [mm] "Connector; Header; 6 Position"
  rect 1.5x1.5 hole 0.9: 1(0,0)
  round 1.5 hole 0.9: 2(2.54,0) 3(5.08,0) 4(7.62,0) 5(10.16,0) 6(12.7,0)
HDR1X6#2 [mm] "Connector; Header; 6 Position"
  rect 1.5x1.5 hole 0.9: 1(-9.682,1.305)
  round 1.5 hole 0.9: 2(-7.281,1.699) 3(-4.984,2.484) 4(-2.948,3.578) 5(-1.017,5.06) 6(0.487,6.652)
HDR1X7 [mm] "Connector; Header; 7 Position"
  round 1.5 hole 0.9: 1(4.089,-4.547) 2(6.35,-4.547) 3(8.788,-4.521) 4(15.011,-6.553) 5(11.074,-4.547) 6(13.36,-4.826) 7(1.803,-4.547)
HDR1X10 [mm] "Connector; Header; 10 Position"
  round 1.5 hole 0.9: 1(1.321,3.607) 2(-0.432,5.766) 3(-2.489,10.668) 4(8.763,2.667) 5(6.299,2.642) 6(3.962,2.667) 7(11.354,2.642) 8(-1.778,8.306) 9(16.078,2.667) 10(13.792,2.692)
KYOCERA-KNH16-DA [mil] "KYOCERA-KNH16-DA"
  rect 16x16 smd: GND(0,-15.75) GND(0,16)
  rect 16x16 hole 12: GND(0,0)
  rect 24x24 smd: P$1(-31.5,0) P$2(32,0)
  silkscreen extent -31,-16 32,16, body extent -20,-10 20,10, height 14
L3GD20 [mm] "4x4x1"
  rect 0.66x0.305 smd mask+0: 1(-1.7,0.975) 2(-1.7,0.325) 3(-1.7,-0.325) 4(-1.7,-0.975) 9(1.7,-0.975) 10(1.7,-0.325) 11(1.7,0.325) 12(1.7,0.975)
  rect 0.305x0.66 smd mask+0: 5(-0.975,-1.7) 6(-0.325,-1.7) 7(0.325,-1.7) 8(0.975,-1.7) 13(0.975,1.7) 14(0.325,1.7) 15(-0.325,1.7) 16(-0.975,1.7)
  silkscreen extent -2.13,-2 2,2.13, body extent -2,-2 2,2, height 0.98
L0402 [mil]
  rect 20x24 smd: 1(-19.68,0) 2(20,0)
  silkscreen extent -3,-12 3,12
LED-0603 [mil] "LED-0603"
  rect 32x32 smd: A(0,-29.53) C(0,30)
  silkscreen extent -12,-4 12,4
LENSMOUNT_LARGE_M12 [mil] "LENSMOUNT_LARGE_M12"
  round 82.13 hole 81 unplated: P$1(-433.07,0)
  round 121.5 hole 81: P$2(434,0)
  body extent -514,-400 514,400, height 906
MICROSMP [mil] "MICROSMP"
  rect 32x32 smd: ANODE(26,0)
  rect 79x44 smd: CATHODE(-49.21,0)
  silkscreen extent -67,-24 24,35
MPU-6500 [mil]
  rrect70% 18x9 smd: 1(-55.12,40) 13(56,-39.37) 18(56,40)
  rrect50% 18x9 smd: 2(-55.12,24) 3(-55.12,8) 4(-55.12,-7.87) 5(-55.12,-23.62) 6(-55.12,-39.37) 14(56,-23.62) 15(56,-7.87) 16(56,8) 17(56,24)
  rrect50% 9x18 smd: 7(-39.37,-55.12) 8(-23.62,-55.12) 9(-7.87,-55.12) 10(8,-55.12) 11(24,-55.12) 20(24,56) 21(8,56) 22(-7.87,56) 23(-23.62,56)
  rrect70% 9x18 smd: 12(40,-55.12) 19(40,56) 24(-39.37,56)
  silkscreen extent -81,-79 62,62, body extent -60,-60 60,60, height 39
MSOP-8 [mil] "MSOP-8"
  rect 16x41 smd: 1(-38.39,-94.49) 2(-12.8,-94.49) 3(13,-94.49) 4(39,-94.49) 5(39,95) 6(13,95) 7(-12.8,95) 8(-38.39,95)
  silkscreen extent -67,-110 60,60
OSCILLATOR-3.2X2.5 [mil] "OSCILLATOR-3.2X2.5"
  rect 56x48 smd: 1(-43.31,-33.46) 2(44,-33.46) 3(44,34) 4(-43.31,34)
  silkscreen extent -95,-83 83,71
OSHW-LOGO-S [mm]
  silkscreen extent -1.49,-1.18 1.5,1.5
PAD.04X.04#1 [mil]
  rrect100% 40x40 smd paste-78.74: P1(0,0)
  silkscreen extent -26,-26 26,26
PAD.04X.04#2 [mil]
  rrect100% 40x40 smd paste-78.74: P$1(0,0)
  silkscreen extent -26,-26 26,26
PAD.05X.05 [mm]
  rrect100% 1.27x1.27 smd: P$1(0,0)
  silkscreen extent -0.84,-0.84 0.84,0.84
PX4-LOGO-20MM [mm]
  silkscreen extent -19.99,-9.65 0.01,0.01
R0402 [mil]
  rect 20x24 smd: 1(-19.69,0) 2(20,0)
  silkscreen extent -3,-12 3,12, body extent -20,-10 20,10, height 12
SOT23-5 [mil] "SOT23-5"
  rect 22x48 smd: 1(-37.4,-51.18) 2(0,-51.19) 3(38,-51.19) 4(38,52)
  rrect50% 22x48 smd: 5(-37.4,52)
  silkscreen extent -56,-17 56,32
SOT23-8 [mil] "SOT23-8"
  rect 17x52 smd: 1(-38.39,-46.26) 2(-12.8,-46.26) 3(13,-46.26) 4(39,-46.26) 5(39,47) 6(13,47) 7(-12.8,47) 8(-38.39,47)
  silkscreen extent -59,-39 60,40, body extent -59,-55 59,55, height 44
STM-LQFP100_N [mm] "Thin QFP, 100-Leads, Body 14x14mm, Pitch 0.5mm, IPC Medium Density"
  oval 1.8x0.3 smd: 1(-7.55,6) 2(-7.55,5.5) 3(-7.55,5) 4(-7.55,4.5) 5(-7.55,4) 6(-7.55,3.5) 7(-7.55,3) 8(-7.55,2.5) 9(-7.55,2) 10(-7.55,1.5) 11(-7.55,1) 12(-7.55,0.5) 13(-7.55,0) 14(-7.55,-0.5) 15(-7.55,-1) 16(-7.55,-1.5) 17(-7.55,-2) 18(-7.55,-2.5) 19(-7.55,-3) 20(-7.55,-3.5) 21(-7.55,-4) 22(-7.55,-4.5) 23(-7.55,-5) 24(-7.55,-5.5) 25(-7.55,-6) 51(7.55,-6) 52(7.55,-5.5) 53(7.55,-5) 54(7.55,-4.5) 55(7.55,-4) 56(7.55,-3.5) 57(7.55,-3) 58(7.55,-2.5) 59(7.55,-2) 60(7.55,-1.5) 61(7.55,-1) 62(7.55,-0.5) 63(7.55,0) 64(7.55,0.5) 65(7.55,1) 66(7.55,1.5) 67(7.55,2) 68(7.55,2.5) 69(7.55,3) 70(7.55,3.5) 71(7.55,4) 72(7.55,4.5) 73(7.55,5) 74(7.55,5.5) 75(7.55,6)
  oval 0.3x1.8 smd: 26(-6,-7.55) 27(-5.5,-7.55) 28(-5,-7.55) 29(-4.5,-7.55) 30(-4,-7.55) 31(-3.5,-7.55) 32(-3,-7.55) 33(-2.5,-7.55) 34(-2,-7.55) 35(-1.5,-7.55) 36(-1,-7.55) 37(-0.5,-7.55) 38(0,-7.55) 39(0.5,-7.55) 40(1,-7.55) 41(1.5,-7.55) 42(2,-7.55) 43(2.5,-7.55) 44(3,-7.55) 45(3.5,-7.55) 46(4,-7.55) 47(4.5,-7.55) 48(5,-7.55) 49(5.5,-7.55) 50(6,-7.55) 76(6,7.55) 77(5.5,7.55) 78(5,7.55) 79(4.5,7.55) 80(4,7.55) 81(3.5,7.55) 82(3,7.55) 83(2.5,7.55) 84(2,7.55) 85(1.5,7.55) 86(1,7.55) 87(0.5,7.55) 88(0,7.55) 89(-0.5,7.55) 90(-1,7.55) 91(-1.5,7.55) 92(-2,7.55) 93(-2.5,7.55) 94(-3,7.55) 95(-3.5,7.55) 96(-4,7.55) 97(-4.5,7.55) 98(-5,7.55) 99(-5.5,7.55) 100(-6,7.55)
  silkscreen extent -7.68,-6.25 6.25,6.82, body extent -7,-7 7,7, height 1.6
TSOP-6 [mil] "TSOP-6"
  rect 28x40 smd: 1(-37.4,-47.24) 2(0,-47.24) 5(0,48) 6(-37.4,48)
  rrect50% 28x40 smd: 3(38,-47.24) 4(38,48)
  silkscreen extent -59,-30 60,30

## Part data
"3DR Logo": library part 3DR_LOGO
BOOT0: "Test pad This footprint includes three classes: The actual test pads, a pogo-pin footprint to mount the pogo-pin as through-hole part and a hole footprint which allows the head of the pogo-pin to pass through (do NOT use the hole to mount the pogo-pin). In a typical test setup, the stack would consist of three PCBs: The actual PCB under testing with a test pad on the bottom, then a second PCB with the hole for the pogo-pin head where the PCB under testing is pressed on and a third PCB at 30 mm / 1.2\" distance with the pogo-pin footprints. The pogo-pins are soldered to the last PCB. To create the stack, copy the board under testing and exchange the footprints - this way the correct positioning is ensured."
C1 C2 C5 C7 C8 C9 C10 C13 C15 C16 C17 C18 C19 C20 C21 C22 C23 C24 C25 C26 C28 C29 C30 C31 C32: library part CAP0402-CAP, "CapacitorStandard 0603 ceramic capacitor, and 0.1\" leaded capacitor."
C3 C4: library part CAP0402, "CAP CER 8PF 50V C0G 0402"
C6 C14 C36: library part CAP1206, "CAP CER 100UF 10V 20% X5R 1206"
C11 C12: library part CAP0603, "Capacitor, 2.2uF, 16V, 10%, X6S, 0603, Ceramic"
C27 C34: library part CAPACITOR-0603, "Capacitor, 2.2uF, 16V, 10%, X6S, 0603, Ceramic"
C33: library part CAPACITOR-0402, "Capacitor, 0.1uF, 16V, Y5V, 0402, Ceramic"
C35: library part CAP0402-CAP, "0402"
C3004: library part CAP0402, "CAP CER 0.1UF 16V Y5V 0402"
D1: library part DIODE-SCHOTTKY_MSMP, "Schottky barrier diode in DO214AC, e.g. Fairchild SS14."
D104 D108: "Diode, TVS, 14VWM, 40VC, 0402, SMD"
L2 L11: "FERRITE BEAD 120 OHM 0402"
L8: library part Inductor
L103 L106: library part KNH16C104DA5TS, "Capacitor, Filter, 0.1uF, 25V, 2A, 0603, SMD"
LED1: library part LED0603, "Green LED"
P1 P2 P3: "Header, 6-Pin"
P4: "Header, 5-Pin"
P5: "Header, 10-Pin"
P6: "Header, 4-Pin"
P7: "Header, 7-Pin"
R1 R2 R3002 R3004: library part RESISTOR0402-RES, "RES 1.5K OHM 1/16W 1% 0402 SMD"
R3 R4 R6 R8 R9 R12 R13 R19 R20: library part RESISTOR0402-RES, "ResistorBasic schematic elements and footprints for 0603, 1206, and PTH 1/10th watt (small) resistors."
R5 R7 R16 R18: library part RESISTOR0402-RES, "RES 10K OHM 1/16W 1% 0402 SMD"
R14: library part RESISTOR0402-RES, "RES SMD 68 OHM 1% 1/4W 0603"
R15 R17: library part RESISTOR0402-RES, "RES SMD 5.6 OHM 1% 1/5W 0603"
R3010: library part RESISTOR0402-RES, "RES 120 OHM 1/16W 1% 0402 SMD"
U1: "Voltage Regulator LDOStandard 150mA LDO voltage regulator in SOT-23 layout. Micrel part MIC5205. BP (by-pass) pin is used to lower output noise with 470pF cap."
U2: "ARM Cortex-M4 32-bit MCU+FPU, 210 DMIPS, 2048 kB Flash, 256 kB Internal RAM, 82 I/Os, 100-pin LQFP, -40 to 105 degC, Tape and Reel"
U3: library part RGB-LED6-PLCC, "RGB LED with separate anode/cathode terminals"
U8: library part EEPROM-I2CMSOP, "I2C EEPROM Generic footprint for I2C EEPROMS. Compatible types include:    Microchip 24FC128-I/MS    Microchip 24AA256-I/MS    ST Microelectronics M24128-BWDW6TP"
U12: "Sensor, Low-power, Three-axis, Angular rate"
U405: library part MPU-6500
U3004: library part MAX3051MAX3051EKA, "IC TXRX CAN 1MBPS SOT23-8"
U$8: "Point Grey compatible M12 lens mount"
U$10: "Open Source Hardware Logo This logo indicates the piece of hardware it is found on incorporates a OSHW license and/or adheres to the definition of open source hardware found here: http://freedomdefined.org/OSHW"
X1: library part OSCILLATOR-3.2X2.5, "CRYSTAL 24MHZ 8PF SMD"

## Free pads (board coordinates)
  oval 1.524x6 hole 0.762 slot 5 at 90 deg: 2(246.101,40.945) 2(272.669,77.14)
  round 1.524 hole 0.762: 3(272.618,56.991) 4(272.618,72.365) 5(272.618,69.723) 6(272.618,66.98) 8(265.709,51.994)

## Via types
v1: diameter 0.45, hole 0.2, Top to Bottom, tented both sides, 258 vias
v2: diameter 0.45, hole 0.2, Route2 to Bottom, tented both sides, 95 vias
v3: diameter 0.45, hole 0.2, Top to Signal Layer 2, tented both sides, 15 vias
v4: diameter 1.27, hole 0.711, Route2 to Bottom, tented both sides, 6 vias
v5: diameter 1.27, hole 0.711, Top to Bottom, tented both sides, 2 vias
v6: diameter 0.45, hole 0.2, Top to Bottom, tented top, 1 vias

## Nets (pads, with @x,y where several pads share a name; then routed paths per layer and width w, separated by ;. In a path a pad name is that pad's centre, name@x,y a point inside that pad or via, vN(x,y) a via of type N, cw(c..) or ccw(c..) an arc to the next point about the centre after c; other vN are vias at no path point)
ADC12_IN4: P5.5 U2.33 | length 20.8
  Route15 w0.254: v2(261.264,55.423) 261.264,49.936 262.117,49.084 265.024,49.084 266.756,47.351 267.328,47.351 268.783,45.897 268.783,44.933 P5.5@272.644,44.933
  Bottom w0.254: U2.33@261.25,54.148 261.25,55.408 v2(261.264,55.423)
ADC12_IN5: P5.6 U2.34 | length 21.2
  Route15 w0.254: v2(260.655,53.01) 260.655,49.936 261.911,48.68 264.856,48.68 266.427,47.109 266.427,43.764 267.195,42.996 272.218,42.996 P5.6@272.618,42.596
  Bottom w0.254: v2(260.655,53.01) 260.75,53.105 U2.34@260.75,54.148
ADC123_IN10: U2.15
ADC123_IN11: P5.9 U2.16 | length 12.4
  Route15 w0.254: v2(267.767,60.198) 268.046,60.198 268.503,59.741 268.503,58.928 267.409,57.833 267.409,55.844 268.541,54.712 P5.9@272.618,54.712
  Bottom w0.254: U2.16@266.3,60.198 v2(267.767,60.198)
ADC123_IN12: P5.10 U2.17 | length 12.7
  Route15 w0.254: v2(267.894,59.309) 267.818,59.309 267.818,59.03 267.005,58.217 267.005,55.677 269.016,53.666 271.348,53.666 271.348,53.67 P5.10@272.593,52.426
  Bottom w0.254: U2.17@266.3,59.698 267.377,59.698 267.767,59.309 v2(267.894,59.309)
ADC123_IN13: U2.18
BLUE_LED: R17.2 U2.44 | length 21.7
  Route2 w0.254: v2(255.092,51.562) 255.067,51.562 255.041,51.537 255.041,49.53 255.702,48.87 255.702,48.844 261.569,48.844
  Route2 w0.3: 261.569,48.844 261.676,48.738 261.771,48.738 262.681,47.828 265.034,47.828 266.126,46.736 v2(267.233,46.736)
  Bottom w0.254: v2(255.092,51.562) 255.092,51.829 255.733,52.47 255.733,54.132 U2.44@255.75,54.148
  Bottom w0.3: v2(267.233,46.736) 267.335,46.736 269.138,44.933 R17.2@269.138,44.196
BOOT0: BOOT0.P$1 R18.2 U2.94 | length 3.8
  Bottom w0.127: BOOT0.P$1@260.375,72.466 261.671,71.171 R18.2@261.772,71.171 U2.94@261.772,69.271
CAM_NRESET: C1.1 R9.1 U2.30 U$5.32 | length 19.2
  Top w0.127: U$5.32@260.546,67.539 260.604,67.481 v3(260.604,66.091)
  Top w0.254: U$5.32@260.546,67.539 260.546,68.573 260.858,68.885 261.823,68.885 262.143,69.205 262.143,69.748 262.168,69.774 262.788,69.774 263.324,69.238 R9.1@263.4,69.238
  Signal Layer 2 w0.127: v3(260.604,66.091) 262.204,64.491 v1(262.204,56.439)
  Bottom w0.127: v1(262.204,56.439) 262.204,56.388 262.75,55.842 U2.30@262.75,54.148
CAN1_RX: U2.81 U3004.4 | length 12.8
  Route2 w0.127: v2(253.289,79.756) 254.152,79.756 254.584,79.324 254.584,71.298 255.092,70.79 v2(255.092,70.739)
  Bottom w0.127: v2(253.289,79.756) U3004.4@253.289,80.689 ; v2(255.092,70.739) 255.25,70.581 U2.81@255.25,69.248
CAN1_TX: U2.82 U3004.1 | length 11.9
  Route2 w0.127: v2(255.254,79.766) 254.991,79.502 254.991,71.476 255.702,70.764 v2(255.778,70.764)
  Bottom w0.127: v2(255.254,79.766) U3004.1@255.254,80.689 ; U2.82@255.75,69.248 255.778,69.277 v2(255.778,70.764)
CAN_H_1: P6.2 R3010.1 U3004.7 | length 5
  Bottom w0.127: U3004.7@254.604,83.058 254.604,84.039 254.729,84.163 R3010.1@254.729,84.531 254.729,86.733 P6.2@255.626,87.63
CAN_L_1: P6.3 R3010.2 U3004.6 | length 4.9
  Bottom w0.127: P6.3@253.086,87.63 253.721,86.995 R3010.2@253.721,84.531 253.721,84.163 253.949,83.934 U3004.6@253.949,83.058
DCMI_D0: U2.63 U$5.43 | length 8.4
  Top w0.127: U$5.43@251.104,66.116 252.222,66.116 252.352,65.986 252.352,65.351 252.374,65.329 v1(252.501,65.329)
  Route2 w0.127: v1(252.501,65.329) 252.522,65.329 252.524,65.331 252.552,65.303 252.552,63.973 252.063,63.484 252.063,62.023 252.44,61.646 v2(252.908,61.646)
  Bottom w0.127: U2.63@251.2,61.698 252.855,61.698 v2(252.908,61.646)
DCMI_D1: U2.64 U$5.42 | length 7
  Top w0.127: U$5.42@252.527,67.539 252.527,66.319 252.806,66.04 252.806,65.928 v1(252.79,65.912)
  Route2 w0.127: v2(252.527,62.179) 252.527,62.321 252.94,62.734 252.94,65.763 v1(252.79,65.912)
  Bottom w0.127: U2.64@251.2,62.198 251.219,62.179 v2(252.527,62.179)
DCMI_D2: U2.97 U$5.41 | length 14.5
  Top w0.127: U$5.41@253.34,67.539 253.39,67.488 v1(253.39,65.964)
  Route15 w0.127: v1(253.39,65.964) 260.883,65.964 261.62,66.7 v2(263.347,66.7)
  Bottom w0.127: U2.97@263.25,69.248 263.239,69.238 263.239,66.809 v2(263.347,66.7)
DCMI_D3: U2.98 U$5.15 | length 17
  Top w0.127: U$5.15@258.946,55.857 258.946,57.499 259.436,57.988 v1(261.087,57.988)
  Route2 w0.127: v1(261.087,57.988) 262.179,57.988 262.179,66.37 v2(263.677,67.869)
  Bottom w0.127: v2(263.677,67.869) 263.677,69.176 U2.98@263.75,69.248
DCMI_D4: U2.3 U$5.16 | length 14.7
  Top w0.127: U$5.16@259.746,55.857 259.817,55.927 v3(259.817,57.429)
  Signal Layer 1 w0.127: v3(259.817,57.429) 259.817,62.124 264.367,66.675 v1(264.897,66.675)
  Bottom w0.127: v1(264.897,66.675) 264.92,66.698 U2.3@266.3,66.698
DCMI_D5: U2.92 U$5.17 | length 13.5
  Top w0.127: U$5.17@260.546,55.857 v1(260.546,57.321) v1@260.579,57.353
  Route2 w0.127: v1(260.546,57.321) 260.546,67.633 v2(260.706,67.793)
  Bottom w0.127: v2(260.706,67.793) 260.706,69.204 U2.92@260.75,69.248
DCMI_D6: U2.4 U$5.18 | length 14.7
  Top w0.127: U$5.18@261.346,55.857 263.197,55.857 v3(263.398,56.058)
  Signal Layer 1 w0.127: v3(263.398,56.058) 263.423,56.083 263.423,65.339 263.997,65.913 v1(264.389,65.913)
  Bottom w0.127: v1(264.389,65.913) 264.49,65.913 264.802,66.225 266.3,66.225 U2.4@266.3,66.198
DCMI_D7: U2.5 U$5.19 | length 11.8
  Top w0.127: U$5.19@262.786,57.297 264.51,57.297 v3(264.592,57.379)
  Signal Layer 1 w0.127: v3(264.592,57.379) 264.592,64.328 264.585,64.334 264.585,65.373 v1(264.998,65.786)
  Bottom w0.127: v1(264.998,65.786) 264.998,65.71 265.01,65.698 U2.5@266.3,65.698
DCMI_D8: U2.78 U$5.45 | length 8
  Top w0.127: U$5.45@251.104,64.516 251.968,64.516 252.451,64.033 v1(253.517,64.033)
  Bottom w0.127: v1(253.517,64.033) 253.829,64.345 253.829,69.169 U2.78@253.75,69.248
DCMI_D9: U2.80 U$5.44 | length 8.3
  Top w0.127: U$5.44@251.104,65.303 251.767,65.303 251.907,65.164 252.063,65.164 252.063,65.079 252.321,64.82 252.321,64.75 252.326,64.745 v1(254.381,64.745)
  Bottom w0.127: v1(254.381,64.745) 254.75,65.113 U2.80@254.75,69.248
DCMI_HSYNC: U2.29 U$5.20 | length 5.6
  Top w0.127: U$5.20@262.786,58.097 262.793,58.09 v1(264.084,58.09)
  Bottom w0.127: U2.29@263.25,54.148 263.25,57.256 v1(264.084,58.09)
DCMI_PIXCK: U2.31 U$5.46 | length 20.9
  Top w0.127: U$5.46@251.104,63.703 251.104,63.595 253.346,63.595 253.467,63.475 v3(253.467,63.424)
  Signal Layer 1 w0.127: v3(253.467,63.424) 259.766,63.424 260.375,64.033 261.087,64.033 v1(261.087,64.059)
  Route15 w0.127: v1(261.087,64.059) 261.525,63.62 261.525,56.127 262.179,55.474 v2(262.179,55.448)
  Bottom w0.127: v2(262.179,55.448) 262.25,55.377 U2.31@262.25,54.148
DCMI_VSYNC: pad.8 U2.93 U$5.21 | length 21.8
  Top w0.127: v1(261.087,58.852) 261.131,58.897 U$5.21@262.786,58.897
  Top w0.254: U$5.21@262.786,58.897 263.987,58.897 265.094,57.79 265.094,56.56 264.516,55.982 264.516,53.619 pad.8@266.065,52.07
  Bottom w0.127: v1(261.087,58.852) 261.525,59.29 261.525,67.342 261.25,67.617 U2.93@261.25,69.248